# EAGLE board RedBoard_ESP32_v01-Panel (EAGLE 9.6.2), part 1 of 9
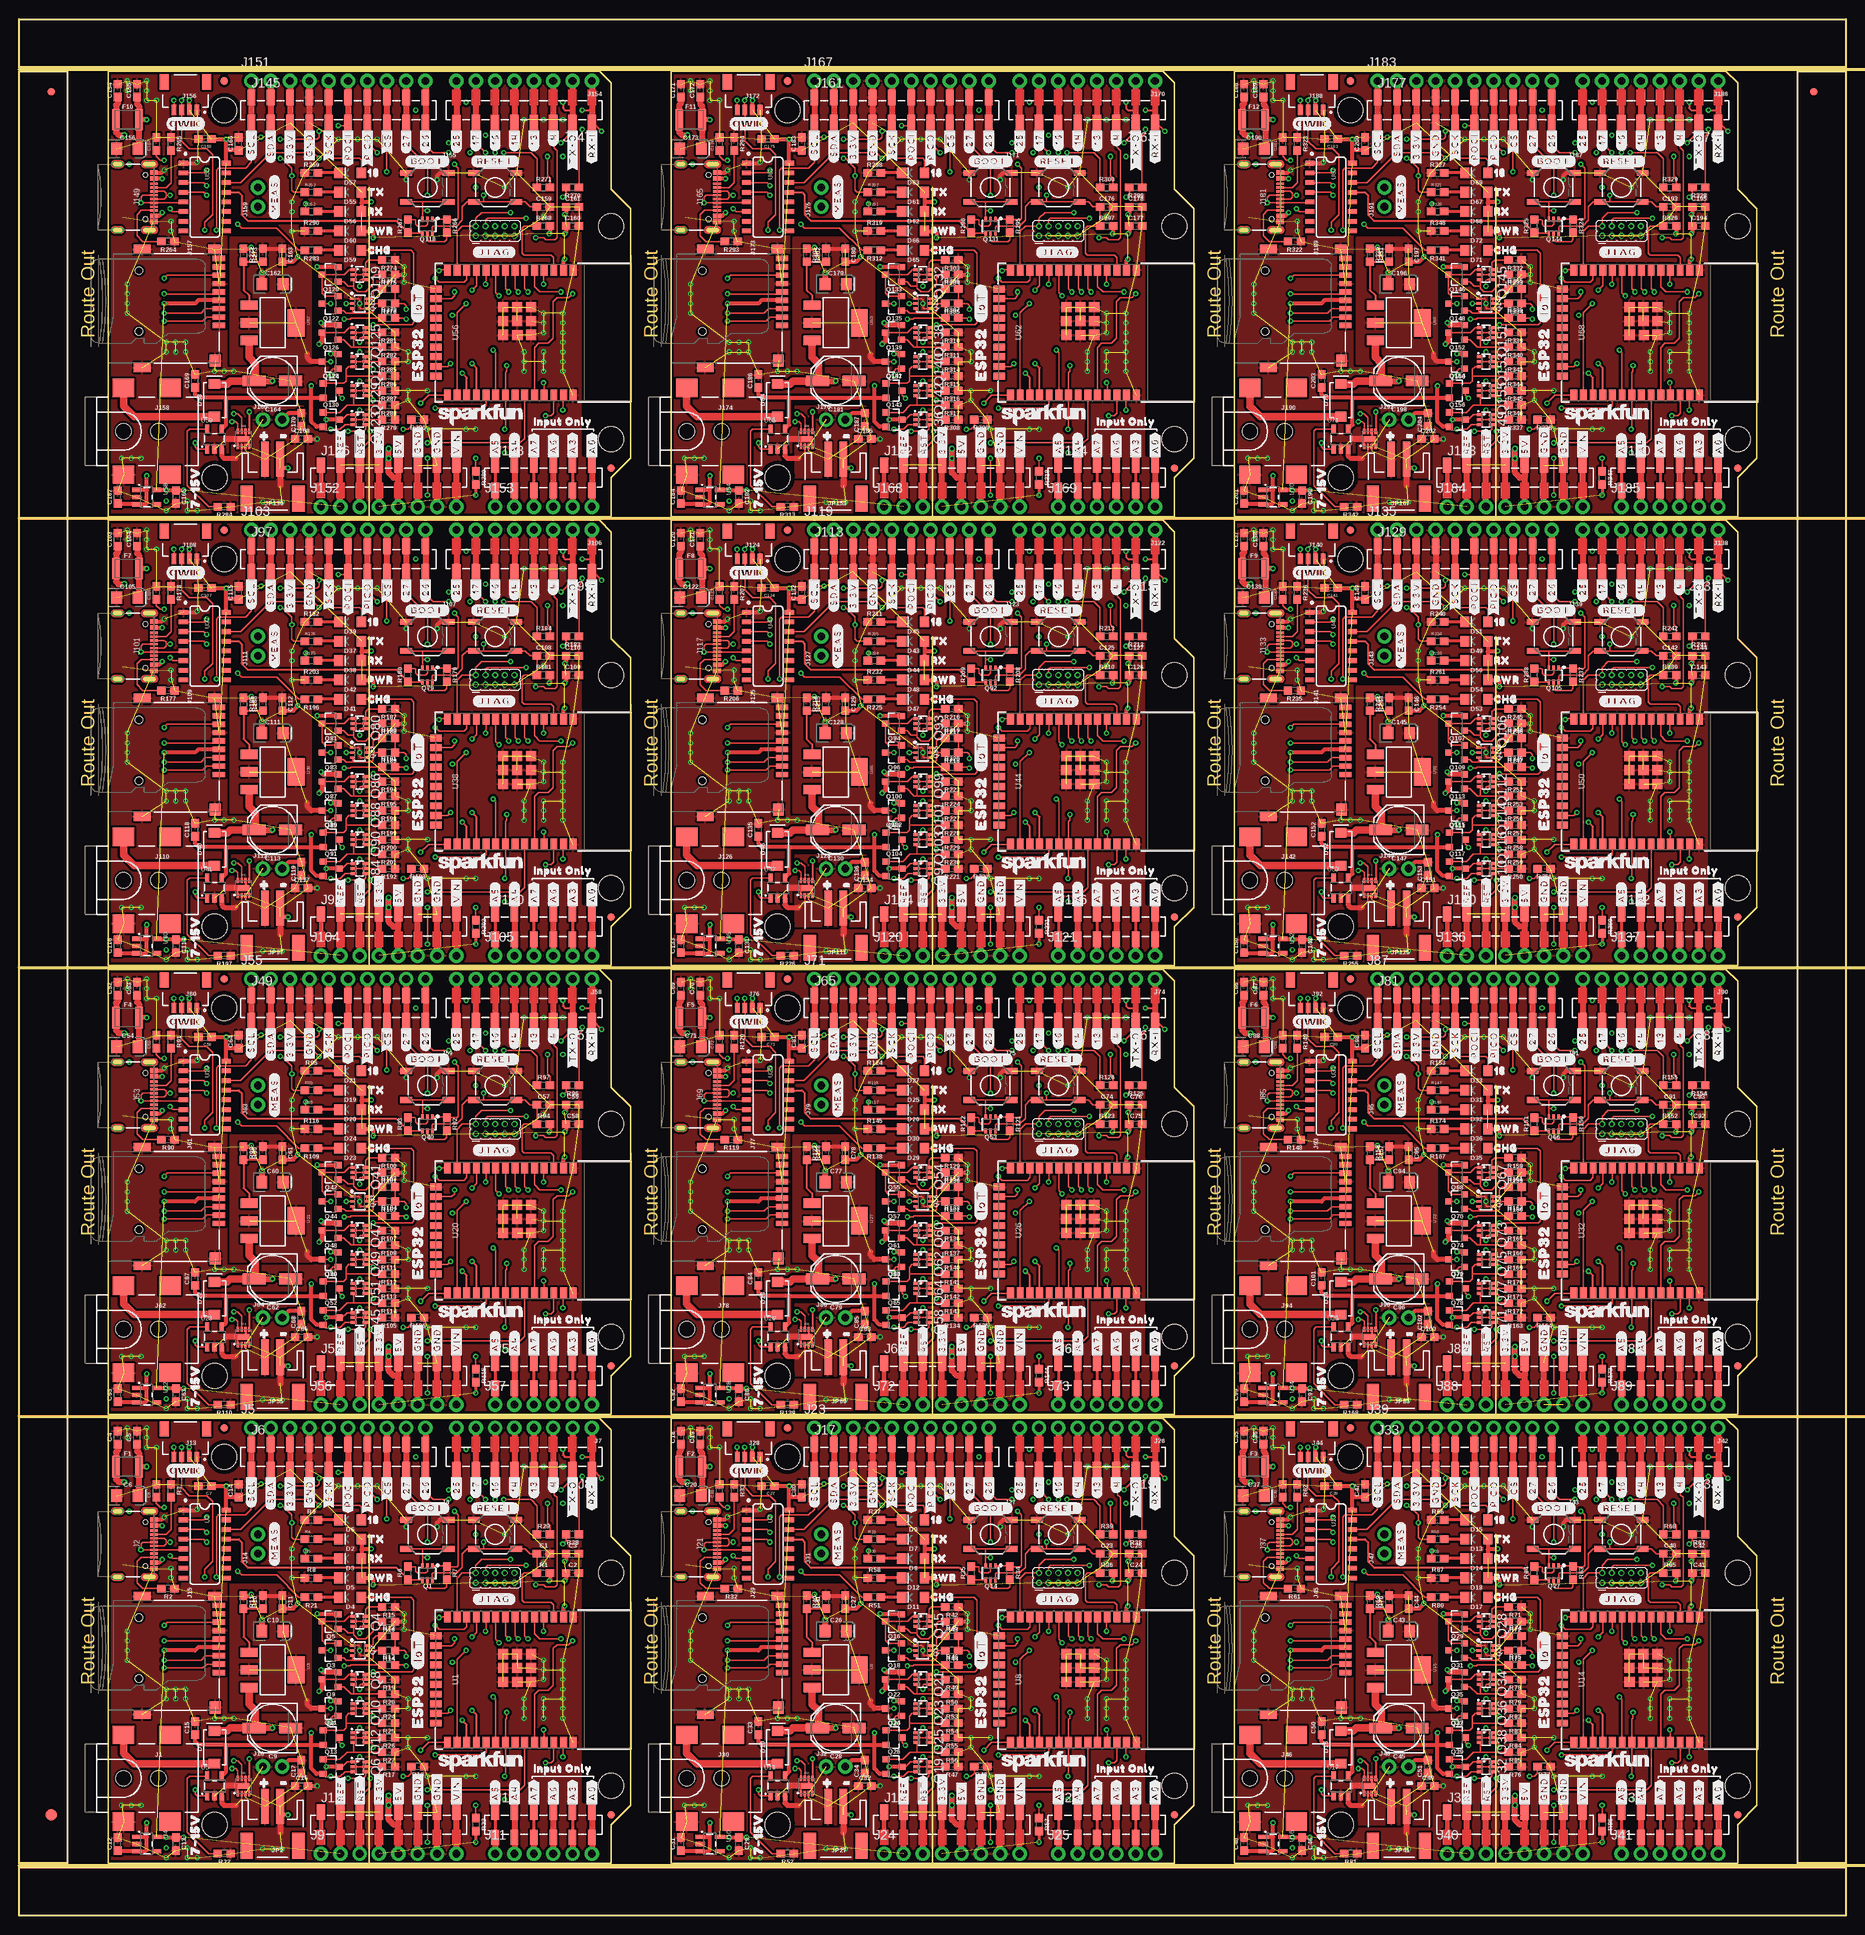
[diagram p0: board, top side]
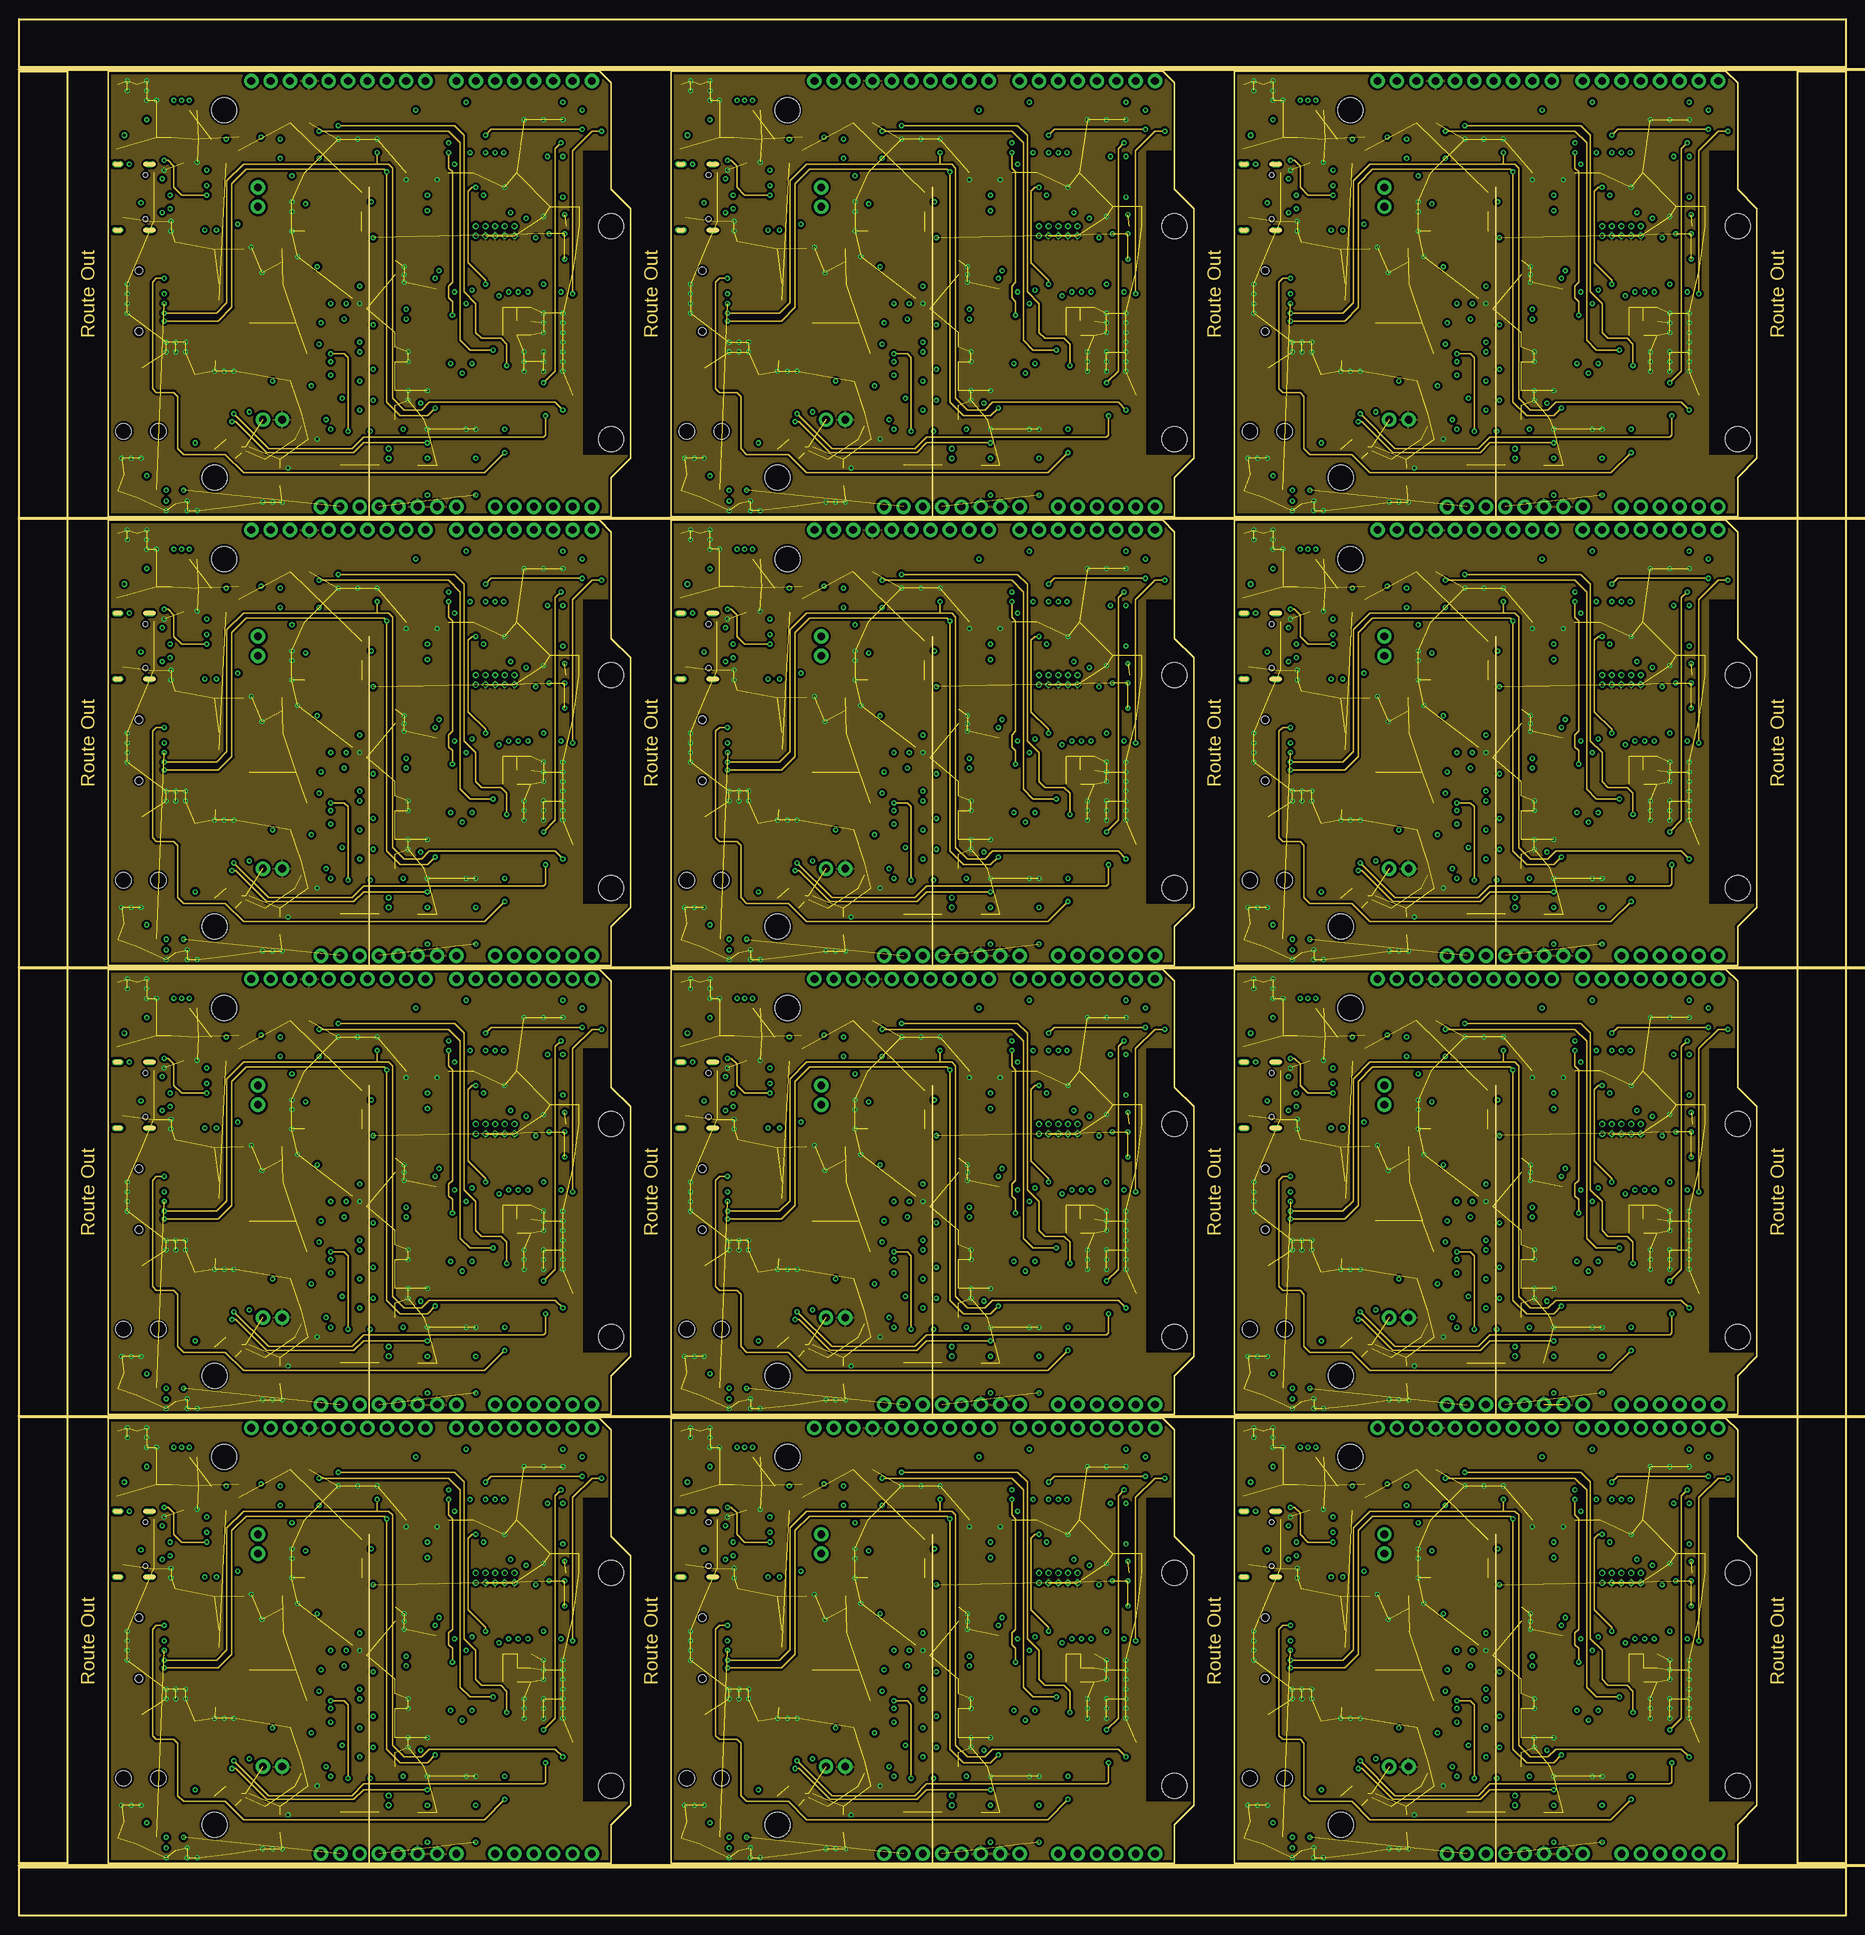
[diagram p1: board, inner layer Route2]
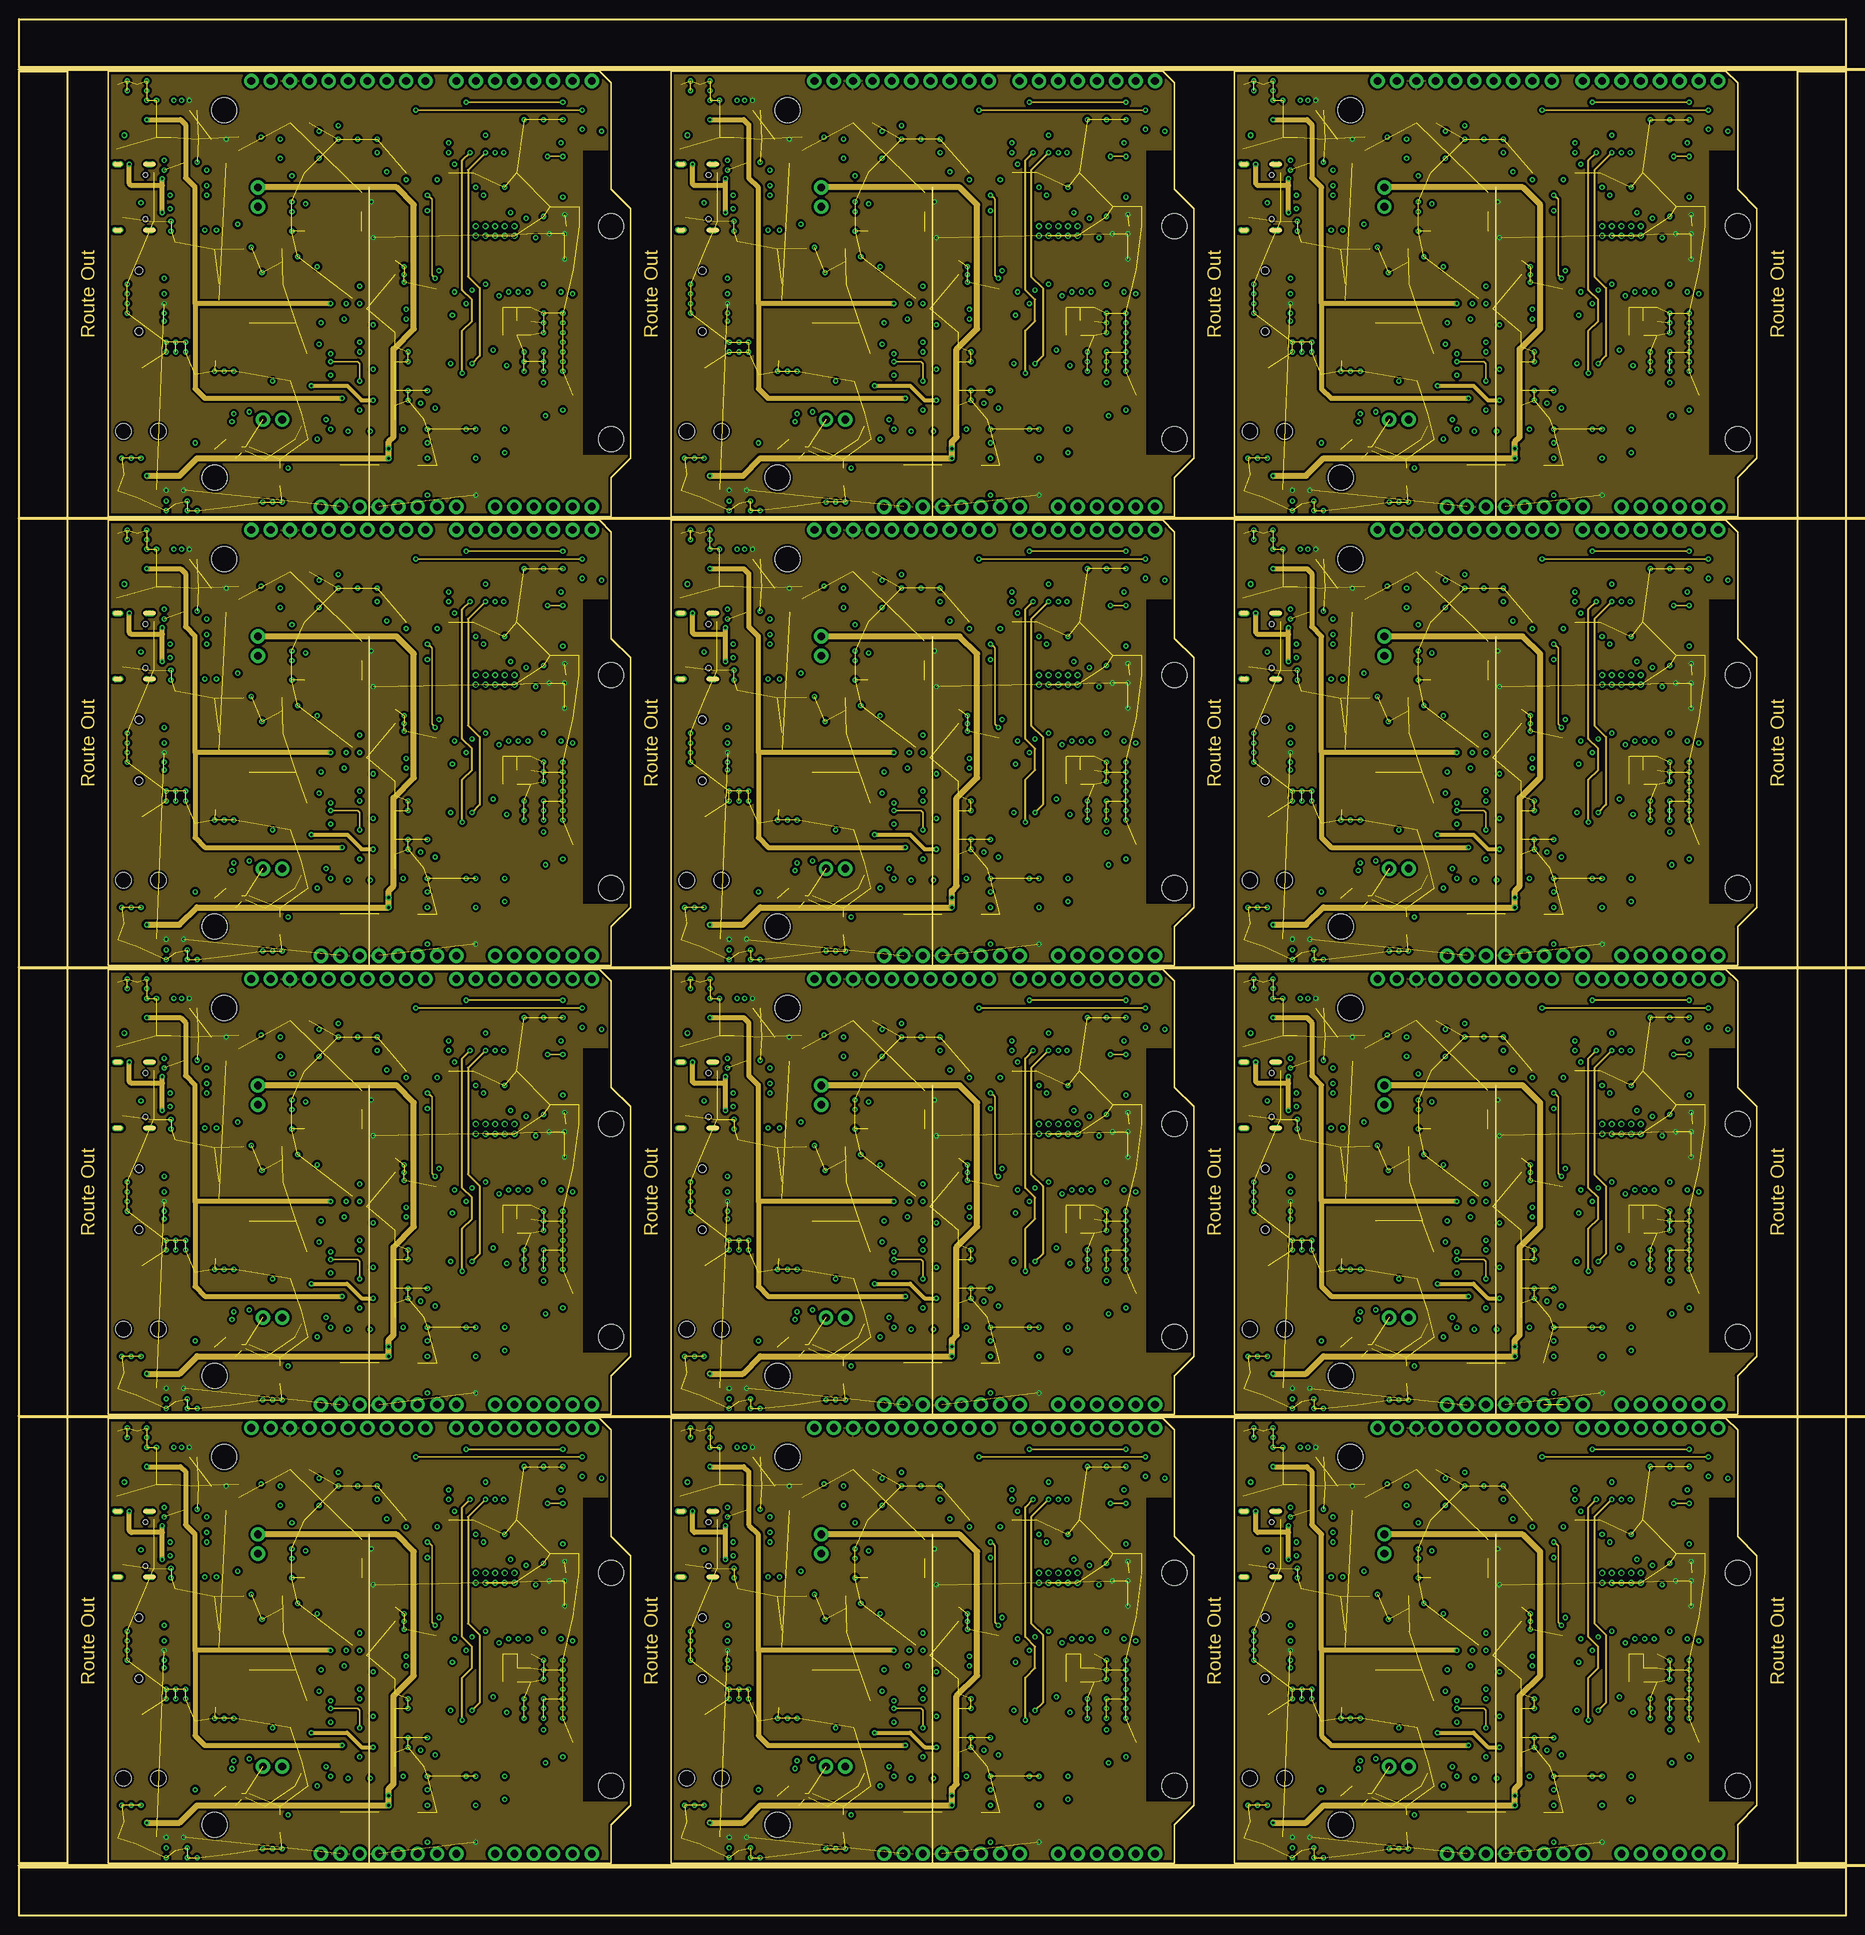
[diagram p2: board, inner layer Route15]
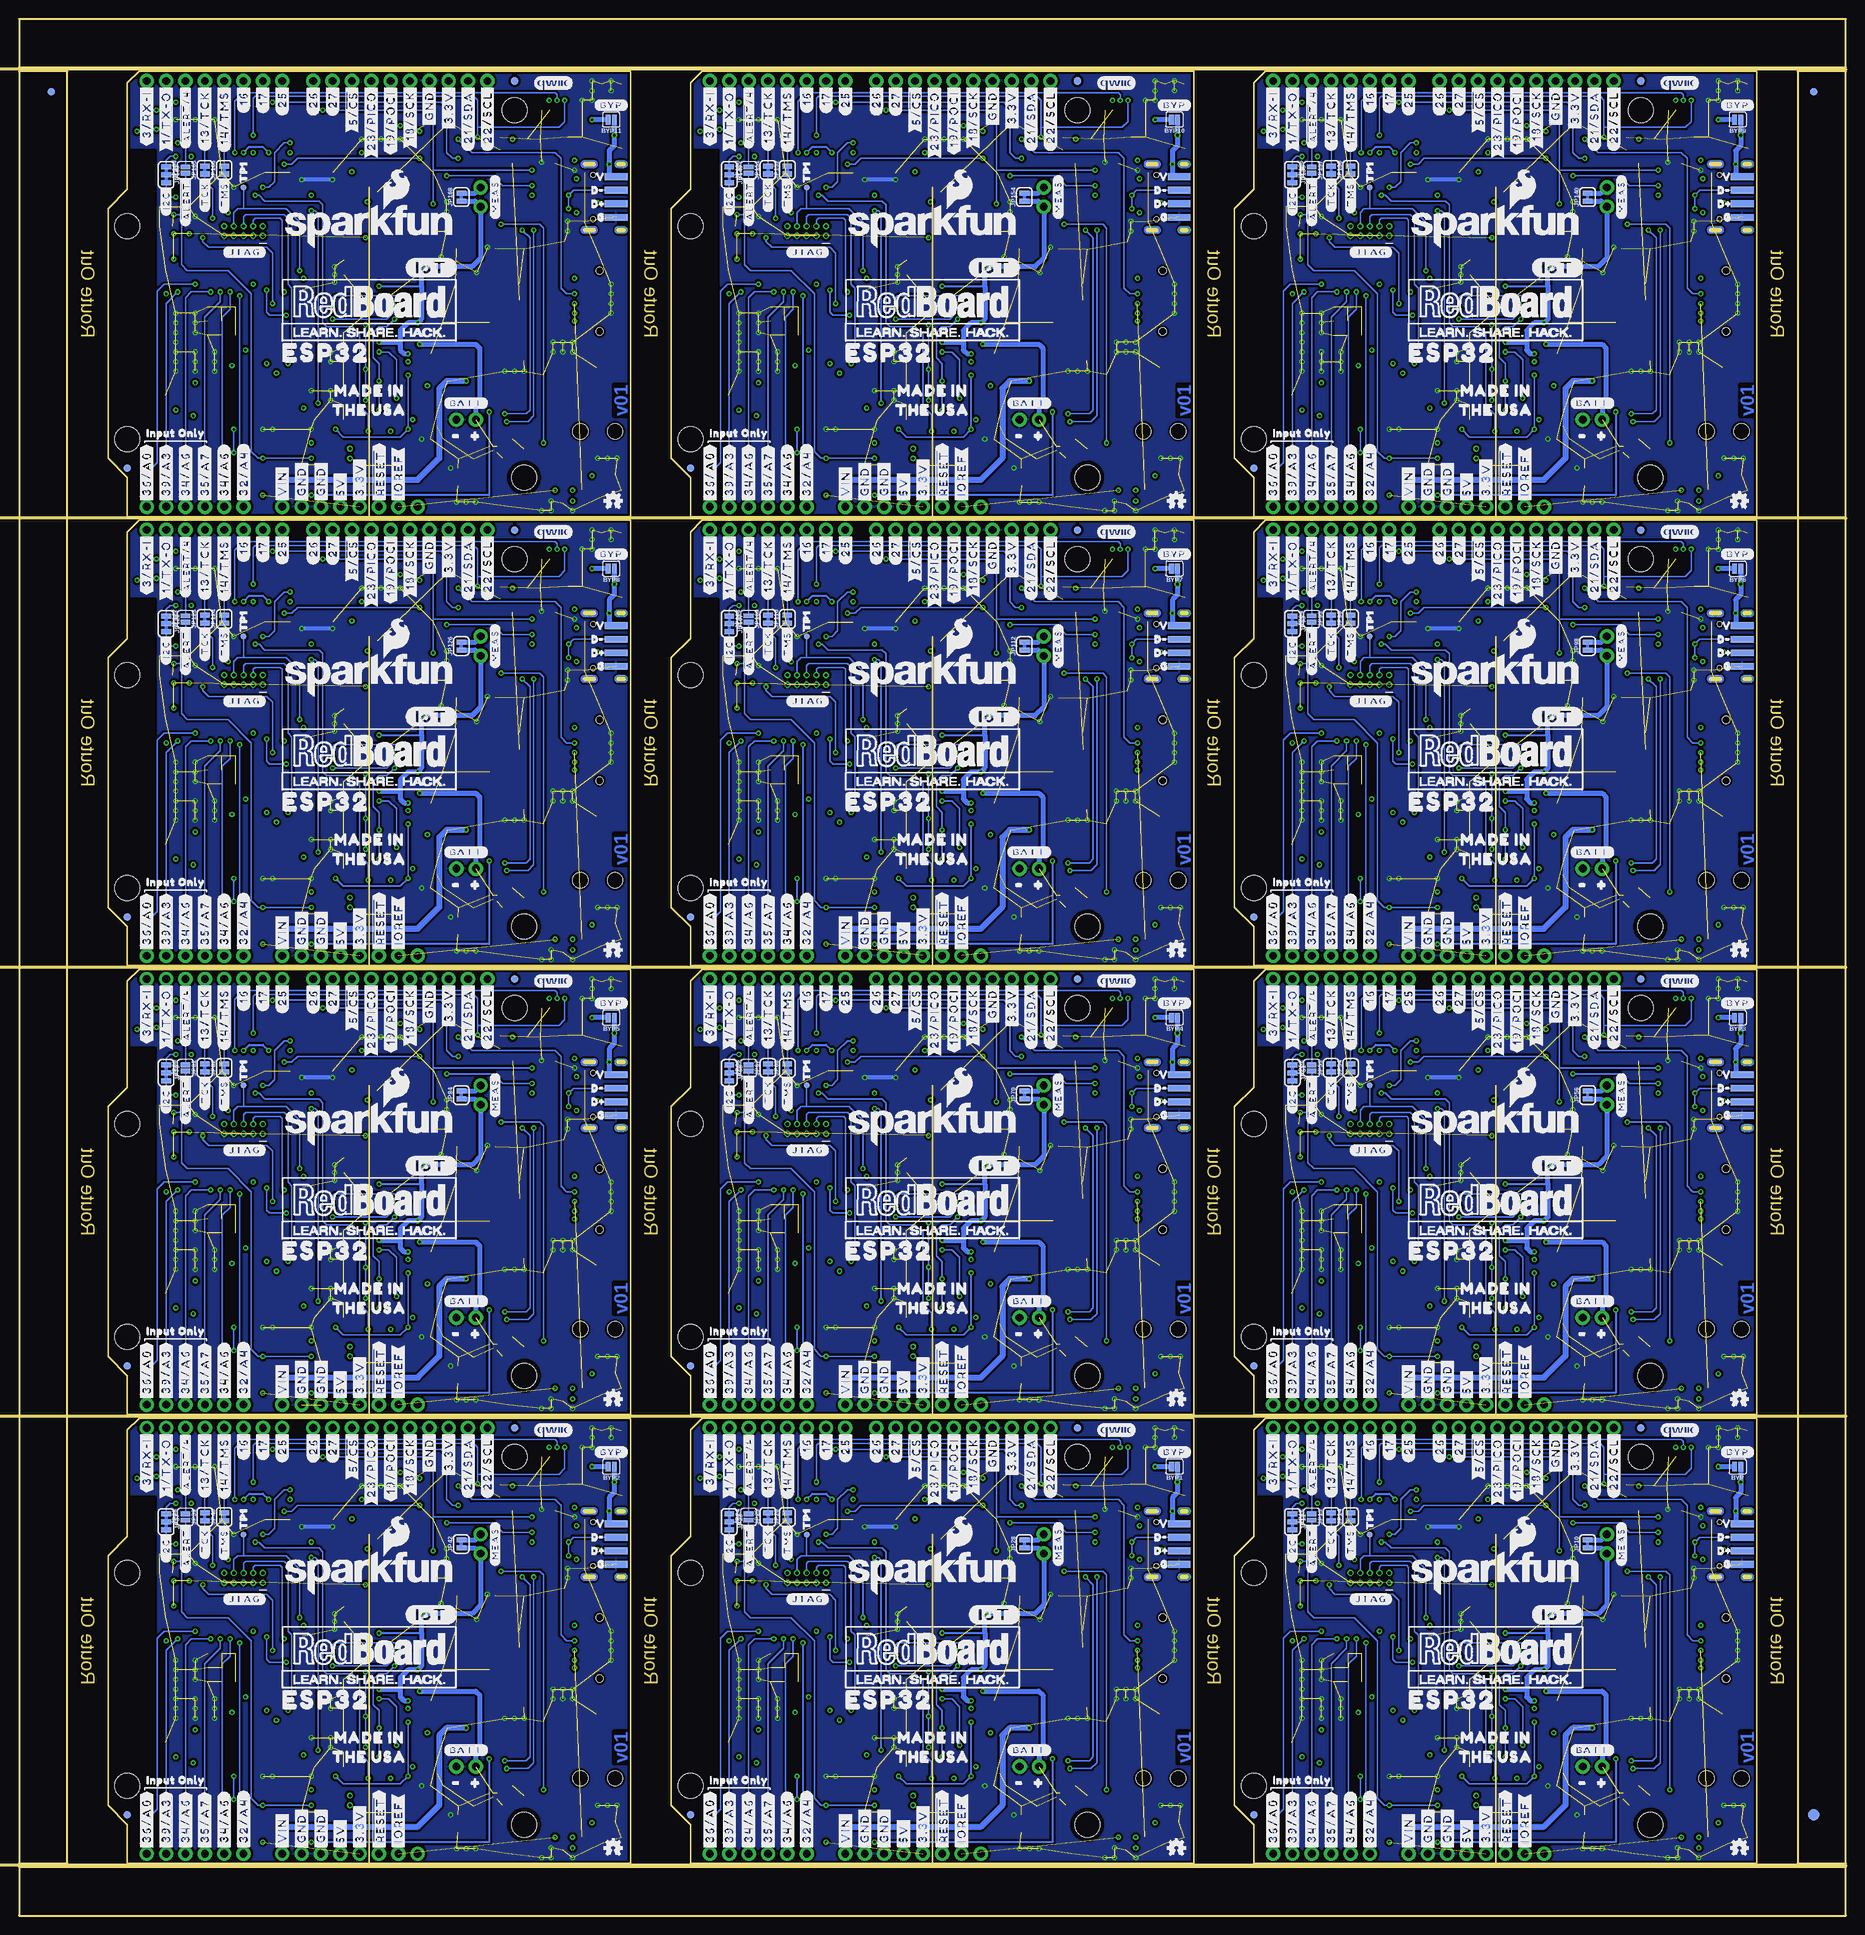
[diagram p3: board, bottom side, seen from below]

Size 239.78 x 248.92 mm. Coordinates in mm from the lower left corner, seen from the top.
Outline: 124 segments
Copper layers (1+2*15+16): Top 0.035559375mm / dielectric 0.47751875mm / Route2 0.035559375mm / dielectric 0.47751875mm / Route15 0.035559375mm / dielectric 0.47751875mm / Bottom 0.035559375mm
Design rules "RedBoard_ESP32_v01": minimum track width 7mil, minimum drill 12mil, track to track 7mil, track to pad 7mil, pad to pad 7mil, via to via 7mil, smd to smd 7mil, copper to edge 7mil, drill to drill 7mil, minimum pad ring 7mil, minimum via ring 7mil, stop-mask expansion 4mil, vias tented up to drill 25mil, thermal gap 10mil
tRestrict: area 74.2,15 to 80.3,54.9; area 148.1,15 to 154.2,54.9; area 222,15 to 228.1,54.9; area 74.2,73.9 to 80.3,113.8; area 148.1,73.9 to 154.2,113.8; area 222,73.9 to 228.1,113.8; area 74.2,132.8 to 80.3,172.7; area 148.1,132.8 to 154.2,172.7; area 222,132.8 to 228.1,172.7; area 74.2,191.8 to 80.3,231.6; area 148.1,191.8 to 154.2,231.6; area 222,191.8 to 228.1,231.6
bRestrict: area 74.2,21.8 to 80.3,40.1; area 74.2,15 to 80.3,54.9; area 148.1,21.8 to 154.2,40.1; area 148.1,15 to 154.2,54.9; area 222,21.8 to 228.1,40.1; area 222,15 to 228.1,54.9; area 74.2,80.8 to 80.3,99.1; area 74.2,73.9 to 80.3,113.8; area 148.1,80.8 to 154.2,99.1; area 148.1,73.9 to 154.2,113.8; area 222,80.8 to 228.1,99.1; area 222,73.9 to 228.1,113.8; 12 more areas
vRestrict: area 12.3,29.2 to 13.7,37.5; area 17.4,30 to 19,37.5; area 59.6,17.7 to 60.2,18.2; area 62.1,17.5 to 62.6,18.4; area 23,36.2 to 24.4,38.5; area 11.9,19.8 to 21.1,31.9; area 86.2,29.2 to 87.6,37.5; area 91.3,30 to 93,37.5; area 133.5,17.7 to 134.1,18.2; area 136,17.5 to 136.5,18.4; area 96.9,36.2 to 98.3,38.5; area 85.9,19.8 to 95,31.9; 60 more areas
Milling: 29 lines

## Footprints (pad centres in the part's own frame; a part is rotated, then mirrored left to right if it is on the bottom)
SMT-JUMPER_2_NO_SILK = smd 0.635 x 1.27: 1 -0.406,0; 2 0.406,0
0603 = smd 1.1 x 1: 1 -0.85,0; 2 0.85,0
EIA3216 = smd 1.4 x 1.6: + 1.4,0; - -1.4,0
PANASONIC_D = smd 3 x 1.4: + 2.4,0; - -2.4,0
SMA-DIODE = smd 1.27 x 1.47: A -2.15,0; C 2.15,0
LED-1206-HIDDENSILK = smd 1.2 x 1.4: A -1.5,0; C 1.5,0
FIDUCIAL-1X2 = smd 1 x 1: 1 0,0
FIDUCIAL-1.5X3 = smd 1.5 x 1.5: 1 0,0
1210 = smd 1 x 2.8: 1 -1.5,0; 2 1.5,0
POWER_JACK_SMD = smd 2.8 x 2.4: GND 0,-5.7; P$4 6.1,-5.7; VIN0 0,5.7; VIN1 6.1,5.7 | hole 2.032: 0,0; 4.572,0
USB-C-16P-2LAYER-PADS = smd 0.3 x 1: A5 -1.25,-0.34; A6 -0.25,-0.34; A7 0.25,-0.34; A8 1.25,-0.34; B5 1.75,-0.34; B6 0.75,-0.34; B7 -0.75,-0.34; B8 -1.75,-0.34 | smd 0.6 x 1: GND -3.225,-0.34; GND2 3.225,-0.34; VBUS1 -2.45,-0.34; VBUS2 2.45,-0.34 | drill 0.4 pad 0.6 long: SHLD1 -4.318,-0.915; SHLD2 4.318,-0.915; SHLD3 -4.318,-5.095; SHLD4 4.318,-5.095 | hole 0.65: -2.89,-1.445; 2.89,-1.445
USB-SOLDER-PADS = smd 3 x 0.9: D+ 0,-0.889; D- 0,0.889; GND 0,-2.667; VBUS 0,2.667
2X5_PTH_SILK_.05 = drill 0.432: 1 0,0; 2 0,1.27; 3 1.27,0; 4 1.27,1.27; 5 2.54,0; 6 2.54,1.27; 7 3.81,0; 8 3.81,1.27; 9 5.08,0; 10 5.08,1.27
1X10_NO_SILK = drill 1.016 pad 1.88: 1 0,0; 2 2.54,0; 3 5.08,0; 4 7.62,0; 5 10.16,0; 6 12.7,0; 7 15.24,0; 8 17.78,0; 9 20.32,0; 10 22.86,0
1X10_SMD_COMBINED = smd 1 x 2: 1A 0,1.65; 1B 0,-1.65; 2A 2.54,1.65; 2B 2.54,-1.65; 3A 5.08,1.65; 3B 5.08,-1.65; 4A 7.62,1.65; 4B 7.62,-1.65; 5A 10.16,1.65; 5B 10.16,-1.65; 6A 12.7,1.65; 6B 12.7,-1.65; 7A 15.24,1.65; 7B 15.24,-1.65; 8A 17.78,1.65; 8B 17.78,-1.65; 9A 20.32,1.65; 9B 20.32,-1.65; 10A 22.86,1.65; 10B 22.86,-1.65
1X08_NO_SILK = drill 1.016 pad 1.88: 1 0,0; 2 2.54,0; 3 5.08,0; 4 7.62,0; 5 10.16,0; 6 12.7,0; 7 15.24,0; 8 17.78,0
1X08_SMD_COMBINED = smd 1 x 2: 1 0,1.65; 2 2.54,1.65; 3 5.08,1.65; 4 7.62,1.652; 5 10.16,1.65; 6 12.7,1.652; 7 15.24,1.65; 8 17.78,1.652
1X06_NO_SILK = drill 1.016 pad 1.88: 1 0,0; 2 2.54,0; 3 5.08,0; 4 7.62,0; 5 10.16,0; 6 12.7,0
1X06_SMD_STRAIGHT_COMBO = smd 1 x 2: 1 0,-1.65; 1-2 0,1.65; 2 2.54,1.65; 2-2 2.54,-1.65; 3 5.08,-1.65; 3-2 5.08,1.65; 4 7.62,1.65; 4-2 7.62,-1.65; 5 10.16,-1.65; 5-2 10.16,1.65; 6 12.7,1.65; 6-2 12.7,-1.65
JST04_1MM_RA = smd 0.6 x 1.35: 1 -1.5,0; 2 -0.5,0; 3 0.5,0; 4 1.5,0 | smd 1.2 x 2: NC1 2.8,-3.675; NC2 -2.8,-3.675
1X02_NO_SILK = drill 1.016 pad 1.88: 1 0,0; 2 2.54,0
MICROSD-EXTERNALPIN = smd 0.7 x 1.6: 1 2.25,10.5; 2 1.15,10.5; 3 0.05,10.5; 4 -1.05,10.5; 5 -2.15,10.5; 6 -3.25,10.5; 7 -4.35,10.5; 8 -5.45,10.5; 9 -6.55,10.5 | smd 1.2 x 1.6: 10 -7.75,9.9 | smd 1.2 x 2.2: 11 -7.75,0.4; 12 7.75,0.4 | smd 1.6 x 1.4: 13 6.85,10 | hole 1: 3.05,0; -4.95,0
JST-2-SMD = smd 1 x 4.6: 1 -1,-3.7; 2 1,-3.7 | smd 1.6 x 3.4: NC1 -3.4,1.5; NC2 3.4,1.5
STAND-OFF = hole 3.302: 0,0
SMT-JUMPER_2_NC_TRACE_SILK = smd 0.66 x 1.27: 1 -0.521,0; 2 0.521,0
SMT-JUMPER_3_2-NC_TRACE_SILK = smd 0.66 x 1.27: 1 -1.041,0; 2 0,0; 3 1.041,0
SC70-6 = smd 0.3 x 0.66: 1 -0.65,-0.92; 2 0,-0.92; 3 0.65,-0.92; 4 0.65,0.92; 5 0,0.92; 6 -0.65,0.92
SOT23-3 = smd 0.8 x 0.9: 1 -0.95,-1; 2 0.95,-1; 3 0,1.1
SOT363_PHILIPS = smd 0.4 x 0.8: 1 -0.65,-0.8; 2 0,-0.8; 3 0.65,-0.8; 4 0.65,0.8; 5 0,0.8; 6 -0.65,0.8
TACTILE_SWITCH_SMD_5.2MM = smd 1.524 x 0.762: 1 -2.794,1.905; 2 2.794,1.905; 3 -2.794,-1.905; 4 2.794,-1.905
PAD.03X.03 = smd 0.762 x 0.762: 1 0,0
ESP-WROOM-32D-NARROW = smd 0.9 x 1.5: 1 6.43,8.238; 2 5.16,8.238; 3 3.89,8.238; 4 2.62,8.238; 5 1.35,8.238; 6 0.08,8.238; 7 -1.19,8.238; 8 -2.46,8.238; 9 -3.73,8.238; 10 -5,8.238; 11 -6.27,8.238; 12 -7.54,8.238; 13 -8.81,8.238; 14 -10.08,8.238; 25 -10.08,-8.238; 26 -8.81,-8.238; 27 -7.54,-8.238; 28 -6.27,-8.238; 29 -5,-8.238; 30 -3.73,-8.238; 31 -2.46,-8.238; 32 -1.19,-8.238; 33 0.08,-8.238; 34 1.35,-8.238; 35 2.62,-8.238; 36 3.89,-8.238; 37 5.16,-8.238; 38 6.43,-8.238 | smd 1.5 x 0.9: 15 -11.57,5.715; 16 -11.57,4.445; 17 -11.57,3.175; 18 -11.57,1.905; 19 -11.57,0.635; 20 -11.57,-0.635; 21 -11.57,-1.905; 22 -11.57,-3.175; 23 -11.57,-4.445; 24 -11.57,-5.715 | smd 1.33 x 1.33: GND1 -0.912,1.531; GNDT1 -2.751,3.346; GNDT2 -2.761,1.516; GNDT3 -2.751,-0.314; GNDT4 -0.891,-0.324; GNDT5 0.909,-0.314; GNDT6 0.909,1.516; GNDT7 0.909,3.346; GNDT8 -0.921,3.346
SO016 = smd 0.6 x 1.2: 1 -4.445,-2.8; 2 -3.175,-2.8; 3 -1.905,-2.8; 4 -0.635,-2.8; 5 0.635,-2.8; 6 1.905,-2.8; 7 3.175,-2.8; 8 4.445,-2.8; 9 4.445,2.8; 10 3.175,2.8; 11 1.905,2.8; 12 0.635,2.8; 13 -0.635,2.8; 14 -1.905,2.8; 15 -3.175,2.8; 16 -4.445,2.8
SOT223 = smd 1.219 x 2.235: 1 -2.311,-3.099; 2 0,-3.099; 3 2.311,-3.099 | smd 3.6 x 2.2: 4 0,3.099
SOT23-5 = smd 0.55 x 1.2: 1 -0.95,-1.3; 2 0,-1.3; 3 0.95,-1.3; 4 0.95,1.3; 5 -0.95,1.3
DFN-8 = smd 0.3 x 0.7: 1 -0.75,-0.99; 2 -0.25,-0.99; 3 0.25,-0.99; 4 0.75,-0.99; 5 0.75,0.99; 6 0.25,0.99; 7 -0.25,0.99; 8 -0.75,0.99 | smd 1.38 x 0.8: 9 0,0

## Placement (x,y rotation side)
BYP  JUMPER-SMT_2_NO_SILK  [SMT-JUMPER_2_NO_SILK]  14.22,58.93 180 bottom
BYP1  JUMPER-SMT_2_NO_SILK  [SMT-JUMPER_2_NO_SILK]  88.14,58.93 180 bottom
BYP2  JUMPER-SMT_2_NO_SILK  [SMT-JUMPER_2_NO_SILK]  162.05,58.93 180 bottom
BYP3  JUMPER-SMT_2_NO_SILK  [SMT-JUMPER_2_NO_SILK]  14.22,117.86 180 bottom
BYP4  JUMPER-SMT_2_NO_SILK  [SMT-JUMPER_2_NO_SILK]  88.14,117.86 180 bottom
BYP5  JUMPER-SMT_2_NO_SILK  [SMT-JUMPER_2_NO_SILK]  162.05,117.86 180 bottom
BYP6  JUMPER-SMT_2_NO_SILK  [SMT-JUMPER_2_NO_SILK]  14.22,176.78 180 bottom
BYP7  JUMPER-SMT_2_NO_SILK  [SMT-JUMPER_2_NO_SILK]  88.14,176.78 180 bottom
BYP8  JUMPER-SMT_2_NO_SILK  [SMT-JUMPER_2_NO_SILK]  162.05,176.78 180 bottom
BYP9  JUMPER-SMT_2_NO_SILK  [SMT-JUMPER_2_NO_SILK]  14.22,235.71 180 bottom
BYP10  JUMPER-SMT_2_NO_SILK  [SMT-JUMPER_2_NO_SILK]  88.14,235.71 180 bottom
BYP11  JUMPER-SMT_2_NO_SILK  [SMT-JUMPER_2_NO_SILK]  162.05,235.71 180 bottom
C1  0.1uF  [0603]  68.83,47.5 0 top
C2  0.1uF  [0603]  72.64,44.96 0 top
C3  10uF  [0603]  72.64,47.5 0 top
C4  0.1uF  [0603]  12.95,62.74 90 top
C5  0.1uF  [0603]  15.49,62.74 90 top
C6  10uF  [EIA3216]  14.22,55.12 0 top
C7  0.1uF  [0603]  24.38,56.39 180 top
C8  10nF  [0603]  18.03,55.75 90 top
C9  47uF  [PANASONIC_D]  33.27,24.64 180 top
C10  10uF  [EIA3216]  33.27,37.34 0 top
C11  0.1uF  [0603]  34.54,41.15 270 top
C12  0.1uF  [0603]  12.95,9.4 90 top
C13  0.1uF  [0603]  20.57,9.4 270 top
C14  10uF  [0603]  28.83,55.75 90 top
C15  4.7uF  [0603]  23.11,24.64 90 top
C16  4.7uF  [0603]  37.08,17.02 0 top
C17  0.1uF  [0603]  37.08,19.56 90 top
C18  0.1uF  [0603]  86.87,62.74 90 top
C19  0.1uF  [0603]  89.41,62.74 90 top
C20  10uF  [EIA3216]  88.14,55.12 0 top
C21  10nF  [0603]  91.95,55.75 90 top
C22  0.1uF  [0603]  98.3,56.39 180 top
C23  0.1uF  [0603]  142.75,47.5 0 top
C24  0.1uF  [0603]  146.56,44.96 0 top
C25  10uF  [0603]  146.56,47.5 0 top
C26  10uF  [EIA3216]  107.19,37.34 0 top
C27  0.1uF  [0603]  108.46,41.15 270 top
C28  47uF  [PANASONIC_D]  107.19,24.64 180 top
C29  0.1uF  [0603]  94.49,9.4 270 top
C30  10uF  [0603]  102.74,55.75 90 top
C31  0.1uF  [0603]  86.87,9.4 90 top
C32  4.7uF  [0603]  111,17.02 0 top
C33  4.7uF  [0603]  97.03,24.64 90 top
C34  0.1uF  [0603]  111,19.56 90 top
C35  0.1uF  [0603]  160.78,62.74 90 top
C36  0.1uF  [0603]  163.32,62.74 90 top
C37  10uF  [EIA3216]  162.05,55.12 0 top
C38  10nF  [0603]  165.86,55.75 90 top
C39  0.1uF  [0603]  172.21,56.39 180 top
C40  0.1uF  [0603]  216.66,47.5 0 top
C41  0.1uF  [0603]  220.47,44.96 0 top
C42  10uF  [0603]  220.47,47.5 0 top
C43  10uF  [EIA3216]  181.1,37.34 0 top
C44  0.1uF  [0603]  182.37,41.15 270 top
C45  47uF  [PANASONIC_D]  181.1,24.64 180 top
C46  0.1uF  [0603]  168.4,9.4 270 top
C47  10uF  [0603]  176.66,55.75 90 top
C48  0.1uF  [0603]  160.78,9.4 90 top
C49  4.7uF  [0603]  184.91,17.02 0 top
C50  4.7uF  [0603]  170.94,24.64 90 top
C51  0.1uF  [0603]  184.91,19.56 90 top
C52  0.1uF  [0603]  12.95,121.67 90 top
C53  0.1uF  [0603]  15.49,121.67 90 top
C54  10uF  [EIA3216]  14.22,114.05 0 top
C55  10nF  [0603]  18.03,114.68 90 top
C56  0.1uF  [0603]  24.38,115.32 180 top
C57  0.1uF  [0603]  68.83,106.43 0 top
C58  0.1uF  [0603]  72.64,103.89 0 top
C59  10uF  [0603]  72.64,106.43 0 top
C60  10uF  [EIA3216]  33.27,96.27 0 top
C61  0.1uF  [0603]  34.54,100.08 270 top
C62  47uF  [PANASONIC_D]  33.27,83.57 180 top
C63  0.1uF  [0603]  20.57,68.33 270 top
C64  10uF  [0603]  28.83,114.68 90 top
C65  0.1uF  [0603]  12.95,68.33 90 top
C66  4.7uF  [0603]  37.08,75.95 0 top
C67  4.7uF  [0603]  23.11,83.57 90 top
C68  0.1uF  [0603]  37.08,78.49 90 top
C69  0.1uF  [0603]  86.87,121.67 90 top
C70  0.1uF  [0603]  89.41,121.67 90 top
C71  10uF  [EIA3216]  88.14,114.05 0 top
C72  10nF  [0603]  91.95,114.68 90 top
C73  0.1uF  [0603]  98.3,115.32 180 top
C74  0.1uF  [0603]  142.75,106.43 0 top
C75  0.1uF  [0603]  146.56,103.89 0 top
C76  10uF  [0603]  146.56,106.43 0 top
C77  10uF  [EIA3216]  107.19,96.27 0 top
C78  0.1uF  [0603]  108.46,100.08 270 top
C79  47uF  [PANASONIC_D]  107.19,83.57 180 top
C80  0.1uF  [0603]  94.49,68.33 270 top
C81  10uF  [0603]  102.74,114.68 90 top
C82  0.1uF  [0603]  86.87,68.33 90 top
C83  4.7uF  [0603]  111,75.95 0 top
C84  4.7uF  [0603]  97.03,83.57 90 top
C85  0.1uF  [0603]  111,78.49 90 top
C86  0.1uF  [0603]  160.78,121.67 90 top
C87  0.1uF  [0603]  163.32,121.67 90 top
C88  10uF  [EIA3216]  162.05,114.05 0 top
C89  10nF  [0603]  165.86,114.68 90 top
C90  0.1uF  [0603]  172.21,115.32 180 top
C91  0.1uF  [0603]  216.66,106.43 0 top
C92  0.1uF  [0603]  220.47,103.89 0 top
C93  10uF  [0603]  220.47,106.43 0 top
C94  10uF  [EIA3216]  181.1,96.27 0 top
C95  0.1uF  [0603]  182.37,100.08 270 top
C96  47uF  [PANASONIC_D]  181.1,83.57 180 top
C97  0.1uF  [0603]  168.4,68.33 270 top
C98  10uF  [0603]  176.66,114.68 90 top
C99  0.1uF  [0603]  160.78,68.33 90 top
C100  4.7uF  [0603]  184.91,75.95 0 top
C101  4.7uF  [0603]  170.94,83.57 90 top
C102  0.1uF  [0603]  184.91,78.49 90 top
C103  0.1uF  [0603]  12.95,180.59 90 top
C104  0.1uF  [0603]  15.49,180.59 90 top
C105  10uF  [EIA3216]  14.22,172.97 0 top
C106  10nF  [0603]  18.03,173.61 90 top
C107  0.1uF  [0603]  24.38,174.24 180 top
C108  0.1uF  [0603]  68.83,165.35 0 top
C109  0.1uF  [0603]  72.64,162.81 0 top
C110  10uF  [0603]  72.64,165.35 0 top
C111  10uF  [EIA3216]  33.27,155.19 0 top
C112  0.1uF  [0603]  34.54,159 270 top
C113  47uF  [PANASONIC_D]  33.27,142.49 180 top
C114  0.1uF  [0603]  20.57,127.25 270 top
C115  10uF  [0603]  28.83,173.61 90 top
C116  0.1uF  [0603]  12.95,127.25 90 top
C117  4.7uF  [0603]  37.08,134.87 0 top
C118  4.7uF  [0603]  23.11,142.49 90 top
C119  0.1uF  [0603]  37.08,137.41 90 top
C120  0.1uF  [0603]  86.87,180.59 90 top
C121  0.1uF  [0603]  89.41,180.59 90 top
C122  10uF  [EIA3216]  88.14,172.97 0 top
C123  10nF  [0603]  91.95,173.61 90 top
C124  0.1uF  [0603]  98.3,174.24 180 top
C125  0.1uF  [0603]  142.75,165.35 0 top
C126  0.1uF  [0603]  146.56,162.81 0 top
C127  10uF  [0603]  146.56,165.35 0 top
C128  10uF  [EIA3216]  107.19,155.19 0 top
C129  0.1uF  [0603]  108.46,159 270 top
C130  47uF  [PANASONIC_D]  107.19,142.49 180 top
C131  0.1uF  [0603]  94.49,127.25 270 top
C132  10uF  [0603]  102.74,173.61 90 top
C133  0.1uF  [0603]  86.87,127.25 90 top
C134  4.7uF  [0603]  111,134.87 0 top
C135  4.7uF  [0603]  97.03,142.49 90 top
C136  0.1uF  [0603]  111,137.41 90 top
C137  0.1uF  [0603]  160.78,180.59 90 top
C138  0.1uF  [0603]  163.32,180.59 90 top
C139  10uF  [EIA3216]  162.05,172.97 0 top
C140  10nF  [0603]  165.86,173.61 90 top
C141  0.1uF  [0603]  172.21,174.24 180 top
C142  0.1uF  [0603]  216.66,165.35 0 top
C143  0.1uF  [0603]  220.47,162.81 0 top
C144  10uF  [0603]  220.47,165.35 0 top
C145  10uF  [EIA3216]  181.1,155.19 0 top
C146  0.1uF  [0603]  182.37,159 270 top
C147  47uF  [PANASONIC_D]  181.1,142.49 180 top
C148  0.1uF  [0603]  168.4,127.25 270 top
C149  10uF  [0603]  176.66,173.61 90 top
C150  0.1uF  [0603]  160.78,127.25 90 top
C151  4.7uF  [0603]  184.91,134.87 0 top
C152  4.7uF  [0603]  170.94,142.49 90 top
C153  0.1uF  [0603]  184.91,137.41 90 top
C154  0.1uF  [0603]  12.95,239.52 90 top
C155  0.1uF  [0603]  15.49,239.52 90 top
C156  10uF  [EIA3216]  14.22,231.9 0 top
C157  10nF  [0603]  18.03,232.54 90 top
C158  0.1uF  [0603]  24.38,233.17 180 top
C159  0.1uF  [0603]  68.83,224.28 0 top
C160  0.1uF  [0603]  72.64,221.74 0 top
C161  10uF  [0603]  72.64,224.28 0 top
C162  10uF  [EIA3216]  33.27,214.12 0 top
C163  0.1uF  [0603]  34.54,217.93 270 top
C164  47uF  [PANASONIC_D]  33.27,201.42 180 top
C165  0.1uF  [0603]  20.57,186.18 270 top
C166  10uF  [0603]  28.83,232.54 90 top
C167  0.1uF  [0603]  12.95,186.18 90 top
C168  4.7uF  [0603]  37.08,193.8 0 top
C169  4.7uF  [0603]  23.11,201.42 90 top
C170  0.1uF  [0603]  37.08,196.34 90 top
C171  0.1uF  [0603]  86.87,239.52 90 top
C172  0.1uF  [0603]  89.41,239.52 90 top
C173  10uF  [EIA3216]  88.14,231.9 0 top
C174  10nF  [0603]  91.95,232.54 90 top
C175  0.1uF  [0603]  98.3,233.17 180 top
C176  0.1uF  [0603]  142.75,224.28 0 top
C177  0.1uF  [0603]  146.56,221.74 0 top
C178  10uF  [0603]  146.56,224.28 0 top
C179  10uF  [EIA3216]  107.19,214.12 0 top
C180  0.1uF  [0603]  108.46,217.93 270 top
C181  47uF  [PANASONIC_D]  107.19,201.42 180 top
C182  0.1uF  [0603]  94.49,186.18 270 top
C183  10uF  [0603]  102.74,232.54 90 top
C184  0.1uF  [0603]  86.87,186.18 90 top
C185  4.7uF  [0603]  111,193.8 0 top
C186  4.7uF  [0603]  97.03,201.42 90 top
C187  0.1uF  [0603]  111,196.34 90 top
C188  0.1uF  [0603]  160.78,239.52 90 top
C189  0.1uF  [0603]  163.32,239.52 90 top
C190  10uF  [EIA3216]  162.05,231.9 0 top
C191  10nF  [0603]  165.86,232.54 90 top
C192  0.1uF  [0603]  172.21,233.17 180 top
C193  0.1uF  [0603]  216.66,224.28 0 top
C194  0.1uF  [0603]  220.47,221.74 0 top
C195  10uF  [0603]  220.47,224.28 0 top
C196  10uF  [EIA3216]  181.1,214.12 0 top
C197  0.1uF  [0603]  182.37,217.93 270 top
C198  47uF  [PANASONIC_D]  181.1,201.42 180 top
C199  0.1uF  [0603]  168.4,186.18 270 top
C200  10uF  [0603]  176.66,232.54 90 top
C201  0.1uF  [0603]  160.78,186.18 90 top
C202  4.7uF  [0603]  184.91,193.8 0 top
C203  4.7uF  [0603]  170.94,201.42 90 top
C204  0.1uF  [0603]  184.91,196.34 90 top
D1  1A/40V/500mV  [SMA-DIODE]  25.65,22.1 90 top
D2  GREEN  [LED-1206-HIDDENSILK]  43.43,49.4 180 top
D3  YELLOW  [LED-1206-HIDDENSILK]  43.43,46.86 180 top
D4  RED  [LED-1206-HIDDENSILK]  43.43,41.78 180 top
D5  PWR  [LED-1206-HIDDENSILK]  43.43,44.32 180 top
D6  BLUE  [LED-1206-HIDDENSILK]  43.43,51.94 180 top
D7  GREEN  [LED-1206-HIDDENSILK]  117.35,49.4 180 top
D8  YELLOW  [LED-1206-HIDDENSILK]  117.35,46.86 180 top
D9  BLUE  [LED-1206-HIDDENSILK]  117.35,51.94 180 top
D10  1A/40V/500mV  [SMA-DIODE]  99.57,22.1 90 top
D11  RED  [LED-1206-HIDDENSILK]  117.35,41.78 180 top
D12  PWR  [LED-1206-HIDDENSILK]  117.35,44.32 180 top
D13  GREEN  [LED-1206-HIDDENSILK]  191.26,49.4 180 top
D14  YELLOW  [LED-1206-HIDDENSILK]  191.26,46.86 180 top
D15  BLUE  [LED-1206-HIDDENSILK]  191.26,51.94 180 top
D16  1A/40V/500mV  [SMA-DIODE]  173.48,22.1 90 top
D17  RED  [LED-1206-HIDDENSILK]  191.26,41.78 180 top
D18  PWR  [LED-1206-HIDDENSILK]  191.26,44.32 180 top
D19  GREEN  [LED-1206-HIDDENSILK]  43.43,108.33 180 top
D20  YELLOW  [LED-1206-HIDDENSILK]  43.43,105.79 180 top
D21  BLUE  [LED-1206-HIDDENSILK]  43.43,110.87 180 top
D22  1A/40V/500mV  [SMA-DIODE]  25.65,81.03 90 top
D23  RED  [LED-1206-HIDDENSILK]  43.43,100.71 180 top
D24  PWR  [LED-1206-HIDDENSILK]  43.43,103.25 180 top
D25  GREEN  [LED-1206-HIDDENSILK]  117.35,108.33 180 top
D26  YELLOW  [LED-1206-HIDDENSILK]  117.35,105.79 180 top
D27  BLUE  [LED-1206-HIDDENSILK]  117.35,110.87 180 top
D28  1A/40V/500mV  [SMA-DIODE]  99.57,81.03 90 top
D29  RED  [LED-1206-HIDDENSILK]  117.35,100.71 180 top
D30  PWR  [LED-1206-HIDDENSILK]  117.35,103.25 180 top
D31  GREEN  [LED-1206-HIDDENSILK]  191.26,108.33 180 top
D32  YELLOW  [LED-1206-HIDDENSILK]  191.26,105.79 180 top
D33  BLUE  [LED-1206-HIDDENSILK]  191.26,110.87 180 top
D34  1A/40V/500mV  [SMA-DIODE]  173.48,81.03 90 top
D35  RED  [LED-1206-HIDDENSILK]  191.26,100.71 180 top
D36  PWR  [LED-1206-HIDDENSILK]  191.26,103.25 180 top
D37  GREEN  [LED-1206-HIDDENSILK]  43.43,167.26 180 top
D38  YELLOW  [LED-1206-HIDDENSILK]  43.43,164.72 180 top
D39  BLUE  [LED-1206-HIDDENSILK]  43.43,169.8 180 top
D40  1A/40V/500mV  [SMA-DIODE]  25.65,139.95 90 top
D41  RED  [LED-1206-HIDDENSILK]  43.43,159.64 180 top
D42  PWR  [LED-1206-HIDDENSILK]  43.43,162.18 180 top
D43  GREEN  [LED-1206-HIDDENSILK]  117.35,167.26 180 top
D44  YELLOW  [LED-1206-HIDDENSILK]  117.35,164.72 180 top
D45  BLUE  [LED-1206-HIDDENSILK]  117.35,169.8 180 top
D46  1A/40V/500mV  [SMA-DIODE]  99.57,139.95 90 top
D47  RED  [LED-1206-HIDDENSILK]  117.35,159.64 180 top
D48  PWR  [LED-1206-HIDDENSILK]  117.35,162.18 180 top
D49  GREEN  [LED-1206-HIDDENSILK]  191.26,167.26 180 top
D50  YELLOW  [LED-1206-HIDDENSILK]  191.26,164.72 180 top
D51  BLUE  [LED-1206-HIDDENSILK]  191.26,169.8 180 top
D52  1A/40V/500mV  [SMA-DIODE]  173.48,139.95 90 top
D53  RED  [LED-1206-HIDDENSILK]  191.26,159.64 180 top
D54  PWR  [LED-1206-HIDDENSILK]  191.26,162.18 180 top
D55  GREEN  [LED-1206-HIDDENSILK]  43.43,226.19 180 top
D56  YELLOW  [LED-1206-HIDDENSILK]  43.43,223.65 180 top
D57  BLUE  [LED-1206-HIDDENSILK]  43.43,228.73 180 top
D58  1A/40V/500mV  [SMA-DIODE]  25.65,198.88 90 top
D59  RED  [LED-1206-HIDDENSILK]  43.43,218.57 180 top
D60  PWR  [LED-1206-HIDDENSILK]  43.43,221.11 180 top
D61  GREEN  [LED-1206-HIDDENSILK]  117.35,226.19 180 top
D62  YELLOW  [LED-1206-HIDDENSILK]  117.35,223.65 180 top
D63  BLUE  [LED-1206-HIDDENSILK]  117.35,228.73 180 top
D64  1A/40V/500mV  [SMA-DIODE]  99.57,198.88 90 top
D65  RED  [LED-1206-HIDDENSILK]  117.35,218.57 180 top
D66  PWR  [LED-1206-HIDDENSILK]  117.35,221.11 180 top
D67  GREEN  [LED-1206-HIDDENSILK]  191.26,226.19 180 top
D68  YELLOW  [LED-1206-HIDDENSILK]  191.26,223.65 180 top
D69  BLUE  [LED-1206-HIDDENSILK]  191.26,228.73 180 top
D70  1A/40V/500mV  [SMA-DIODE]  173.48,198.88 90 top
D71  RED  [LED-1206-HIDDENSILK]  191.26,218.57 180 top
D72  PWR  [LED-1206-HIDDENSILK]  191.26,221.11 180 top
E$1  [FIDUCIAL-1X2]  4.23,239.4 0 top
E$2  [FIDUCIAL-1X2]  4.23,239.4 0 bottom
E$3  [FIDUCIAL-1X2]  235.54,239.4 0 top
E$4  [FIDUCIAL-1X2]  235.54,239.4 0 bottom
E$5  [FIDUCIAL-1.5X3]  4.23,13.21 0 top
E$6  [FIDUCIAL-1.5X3]  4.23,13.21 0 bottom
F1  6V/2A  [1210]  14.22,58.93 0 top
F2  6V/2A  [1210]  88.14,58.93 0 top
F3  6V/2A  [1210]  162.05,58.93 0 top
F4  6V/2A  [1210]  14.22,117.86 0 top
F5  6V/2A  [1210]  88.14,117.86 0 top
F6  6V/2A  [1210]  162.05,117.86 0 top
F7  6V/2A  [1210]  14.22,176.78 0 top
F8  6V/2A  [1210]  88.14,176.78 0 top
F9  6V/2A  [1210]  162.05,176.78 0 top
F10  6V/2A  [1210]  14.22,235.71 0 top
F11  6V/2A  [1210]  88.14,235.71 0 top
F12  6V/2A  [1210]  162.05,235.71 0 top
J1  5.5x2.1mm Barrel  [POWER_JACK_SMD]  13.72,18.03 0 top
J2  USB C  [USB-C-16P-2LAYER-PADS]  18.03,48.77 270 top
J3  USB_SOLDER_PADS  [USB-SOLDER-PADS]  13.59,48.77 0 bottom
J4  [2X5_PTH_SILK_.05]  59.94,43.69 0 top
J5  M10NO_SILK  [1X10_NO_SILK]  30.48,64.01 0 top
J6  [1X10_SMD_COMBINED]  30.48,60.2 0 top
J7  [1X08_NO_SILK]  75.18,64.01 180 top
J8  [1X08_SMD_COMBINED]  75.18,60.2 180 top
J9  [1X08_NO_SILK]  39.62,8.13 0 top
J10  [1X08_SMD_COMBINED]  39.62,11.94 0 top
J11  [1X06_NO_SILK]  62.48,8.13 0 top
J12  [1X06_SMD_STRAIGHT_COMBO]  62.48,11.94 0 top
J13  QWIIC_RIGHT_ANGLE  [JST04_1MM_RA]  21.84,60.2 180 top
J14  [1X02_NO_SILK]  31.37,47.5 90 top
J15  MICRO-SD-PUSH-PUSH-EXT-PIN  [MICROSD-EXTERNALPIN]  15.75,34.16 270 top
J16  [1X02_NO_SILK]  32,19.56 0 top
J17  [1X10_SMD_COMBINED]  104.39,60.2 0 top
J18  [1X08_SMD_COMBINED]  113.54,11.94 0 top
J19  [1X08_SMD_COMBINED]  149.1,60.2 180 top
J20  [1X06_SMD_STRAIGHT_COMBO]  136.4,11.94 0 top
J21  USB C  [USB-C-16P-2LAYER-PADS]  91.95,48.77 270 top
J22  USB_SOLDER_PADS  [USB-SOLDER-PADS]  87.5,48.77 0 bottom
J23  M10NO_SILK  [1X10_NO_SILK]  104.39,64.01 0 top
J24  [1X08_NO_SILK]  113.54,8.13 0 top
J25  [1X06_NO_SILK]  136.4,8.13 0 top
J26  [1X08_NO_SILK]  149.1,64.01 180 top
J27  [2X5_PTH_SILK_.05]  133.86,43.69 0 top
J28  QWIIC_RIGHT_ANGLE  [JST04_1MM_RA]  95.76,60.2 180 top
J29  MICRO-SD-PUSH-PUSH-EXT-PIN  [MICROSD-EXTERNALPIN]  89.66,34.16 270 top
J30  5.5x2.1mm Barrel  [POWER_JACK_SMD]  87.63,18.03 0 top
J31  [1X02_NO_SILK]  105.28,47.5 90 top
J32  [1X02_NO_SILK]  105.92,19.56 0 top
J33  [1X10_SMD_COMBINED]  178.31,60.2 0 top
J34  [1X08_SMD_COMBINED]  187.45,11.94 0 top
J35  [1X08_SMD_COMBINED]  223.01,60.2 180 top
J36  [1X06_SMD_STRAIGHT_COMBO]  210.31,11.94 0 top
J37  USB C  [USB-C-16P-2LAYER-PADS]  165.86,48.77 270 top
J38  USB_SOLDER_PADS  [USB-SOLDER-PADS]  161.42,48.77 0 bottom
J39  M10NO_SILK  [1X10_NO_SILK]  178.31,64.01 0 top
J40  [1X08_NO_SILK]  187.45,8.13 0 top
J41  [1X06_NO_SILK]  210.31,8.13 0 top
J42  [1X08_NO_SILK]  223.01,64.01 180 top
J43  [2X5_PTH_SILK_.05]  207.77,43.69 0 top
J44  QWIIC_RIGHT_ANGLE  [JST04_1MM_RA]  169.67,60.2 180 top
J45  MICRO-SD-PUSH-PUSH-EXT-PIN  [MICROSD-EXTERNALPIN]  163.58,34.16 270 top
J46  5.5x2.1mm Barrel  [POWER_JACK_SMD]  161.54,18.03 0 top
J47  [1X02_NO_SILK]  179.2,47.5 90 top
J48  [1X02_NO_SILK]  179.83,19.56 0 top
J49  [1X10_SMD_COMBINED]  30.48,119.13 0 top
J50  [1X08_SMD_COMBINED]  39.62,70.87 0 top
J51  [1X08_SMD_COMBINED]  75.18,119.13 180 top
J52  [1X06_SMD_STRAIGHT_COMBO]  62.48,70.87 0 top
J53  USB C  [USB-C-16P-2LAYER-PADS]  18.03,107.7 270 top
J54  USB_SOLDER_PADS  [USB-SOLDER-PADS]  13.59,107.7 0 bottom
J55  M10NO_SILK  [1X10_NO_SILK]  30.48,122.94 0 top
J56  [1X08_NO_SILK]  39.62,67.06 0 top
J57  [1X06_NO_SILK]  62.48,67.06 0 top
J58  [1X08_NO_SILK]  75.18,122.94 180 top
J59  [2X5_PTH_SILK_.05]  59.94,102.62 0 top
J60  QWIIC_RIGHT_ANGLE  [JST04_1MM_RA]  21.84,119.13 180 top
J61  MICRO-SD-PUSH-PUSH-EXT-PIN  [MICROSD-EXTERNALPIN]  15.75,93.09 270 top
J62  5.5x2.1mm Barrel  [POWER_JACK_SMD]  13.72,76.96 0 top
J63  [1X02_NO_SILK]  31.37,106.43 90 top
J64  [1X02_NO_SILK]  32,78.49 0 top
J65  [1X10_SMD_COMBINED]  104.39,119.13 0 top
J66  [1X08_SMD_COMBINED]  113.54,70.87 0 top
J67  [1X08_SMD_COMBINED]  149.1,119.13 180 top
J68  [1X06_SMD_STRAIGHT_COMBO]  136.4,70.87 0 top
J69  USB C  [USB-C-16P-2LAYER-PADS]  91.95,107.7 270 top
J70  USB_SOLDER_PADS  [USB-SOLDER-PADS]  87.5,107.7 0 bottom
J71  M10NO_SILK  [1X10_NO_SILK]  104.39,122.94 0 top
J72  [1X08_NO_SILK]  113.54,67.06 0 top
J73  [1X06_NO_SILK]  136.4,67.06 0 top
J74  [1X08_NO_SILK]  149.1,122.94 180 top
J75  [2X5_PTH_SILK_.05]  133.86,102.62 0 top
J76  QWIIC_RIGHT_ANGLE  [JST04_1MM_RA]  95.76,119.13 180 top
J77  MICRO-SD-PUSH-PUSH-EXT-PIN  [MICROSD-EXTERNALPIN]  89.66,93.09 270 top
J78  5.5x2.1mm Barrel  [POWER_JACK_SMD]  87.63,76.96 0 top
J79  [1X02_NO_SILK]  105.28,106.43 90 top
J80  [1X02_NO_SILK]  105.92,78.49 0 top
J81  [1X10_SMD_COMBINED]  178.31,119.13 0 top
J82  [1X08_SMD_COMBINED]  187.45,70.87 0 top
J83  [1X08_SMD_COMBINED]  223.01,119.13 180 top
J84  [1X06_SMD_STRAIGHT_COMBO]  210.31,70.87 0 top
J85  USB C  [USB-C-16P-2LAYER-PADS]  165.86,107.7 270 top
J86  USB_SOLDER_PADS  [USB-SOLDER-PADS]  161.42,107.7 0 bottom
J87  M10NO_SILK  [1X10_NO_SILK]  178.31,122.94 0 top
J88  [1X08_NO_SILK]  187.45,67.06 0 top
J89  [1X06_NO_SILK]  210.31,67.06 0 top
J90  [1X08_NO_SILK]  223.01,122.94 180 top
J91  [2X5_PTH_SILK_.05]  207.77,102.62 0 top
J92  QWIIC_RIGHT_ANGLE  [JST04_1MM_RA]  169.67,119.13 180 top
J93  MICRO-SD-PUSH-PUSH-EXT-PIN  [MICROSD-EXTERNALPIN]  163.58,93.09 270 top
J94  5.5x2.1mm Barrel  [POWER_JACK_SMD]  161.54,76.96 0 top
J95  [1X02_NO_SILK]  179.2,106.43 90 top
J96  [1X02_NO_SILK]  179.83,78.49 0 top
J97  [1X10_SMD_COMBINED]  30.48,178.05 0 top
J98  [1X08_SMD_COMBINED]  39.62,129.79 0 top
J99  [1X08_SMD_COMBINED]  75.18,178.05 180 top
J100  [1X06_SMD_STRAIGHT_COMBO]  62.48,129.79 0 top
J101  USB C  [USB-C-16P-2LAYER-PADS]  18.03,166.62 270 top
J102  USB_SOLDER_PADS  [USB-SOLDER-PADS]  13.59,166.62 0 bottom
J103  M10NO_SILK  [1X10_NO_SILK]  30.48,181.86 0 top
J104  [1X08_NO_SILK]  39.62,125.98 0 top
J105  [1X06_NO_SILK]  62.48,125.98 0 top
J106  [1X08_NO_SILK]  75.18,181.86 180 top
J107  [2X5_PTH_SILK_.05]  59.94,161.54 0 top
J108  QWIIC_RIGHT_ANGLE  [JST04_1MM_RA]  21.84,178.05 180 top
J109  MICRO-SD-PUSH-PUSH-EXT-PIN  [MICROSD-EXTERNALPIN]  15.75,152.02 270 top
J110  5.5x2.1mm Barrel  [POWER_JACK_SMD]  13.72,135.89 0 top
J111  [1X02_NO_SILK]  31.37,165.35 90 top
J112  [1X02_NO_SILK]  32,137.41 0 top
J113  [1X10_SMD_COMBINED]  104.39,178.05 0 top
J114  [1X08_SMD_COMBINED]  113.54,129.79 0 top
J115  [1X08_SMD_COMBINED]  149.1,178.05 180 top
J116  [1X06_SMD_STRAIGHT_COMBO]  136.4,129.79 0 top
J117  USB C  [USB-C-16P-2LAYER-PADS]  91.95,166.62 270 top
J118  USB_SOLDER_PADS  [USB-SOLDER-PADS]  87.5,166.62 0 bottom
J119  M10NO_SILK  [1X10_NO_SILK]  104.39,181.86 0 top
J120  [1X08_NO_SILK]  113.54,125.98 0 top
J121  [1X06_NO_SILK]  136.4,125.98 0 top
J122  [1X08_NO_SILK]  149.1,181.86 180 top
J123  [2X5_PTH_SILK_.05]  133.86,161.54 0 top
J124  QWIIC_RIGHT_ANGLE  [JST04_1MM_RA]  95.76,178.05 180 top
J125  MICRO-SD-PUSH-PUSH-EXT-PIN  [MICROSD-EXTERNALPIN]  89.66,152.02 270 top
J126  5.5x2.1mm Barrel  [POWER_JACK_SMD]  87.63,135.89 0 top
J127  [1X02_NO_SILK]  105.28,165.35 90 top
J128  [1X02_NO_SILK]  105.92,137.41 0 top
J129  [1X10_SMD_COMBINED]  178.31,178.05 0 top
J130  [1X08_SMD_COMBINED]  187.45,129.79 0 top
J131  [1X08_SMD_COMBINED]  223.01,178.05 180 top
J132  [1X06_SMD_STRAIGHT_COMBO]  210.31,129.79 0 top
J133  USB C  [USB-C-16P-2LAYER-PADS]  165.86,166.62 270 top
J134  USB_SOLDER_PADS  [USB-SOLDER-PADS]  161.42,166.62 0 bottom
J135  M10NO_SILK  [1X10_NO_SILK]  178.31,181.86 0 top
J136  [1X08_NO_SILK]  187.45,125.98 0 top
J137  [1X06_NO_SILK]  210.31,125.98 0 top
J138  [1X08_NO_SILK]  223.01,181.86 180 top
J139  [2X5_PTH_SILK_.05]  207.77,161.54 0 top
J140  QWIIC_RIGHT_ANGLE  [JST04_1MM_RA]  169.67,178.05 180 top
J141  MICRO-SD-PUSH-PUSH-EXT-PIN  [MICROSD-EXTERNALPIN]  163.58,152.02 270 top
J142  5.5x2.1mm Barrel  [POWER_JACK_SMD]  161.54,135.89 0 top
J143  [1X02_NO_SILK]  179.2,165.35 90 top
J144  [1X02_NO_SILK]  179.83,137.41 0 top
J145  [1X10_SMD_COMBINED]  30.48,236.98 0 top
J146  [1X08_SMD_COMBINED]  39.62,188.72 0 top
J147  [1X08_SMD_COMBINED]  75.18,236.98 180 top
J148  [1X06_SMD_STRAIGHT_COMBO]  62.48,188.72 0 top
J149  USB C  [USB-C-16P-2LAYER-PADS]  18.03,225.55 270 top
J150  USB_SOLDER_PADS  [USB-SOLDER-PADS]  13.59,225.55 0 bottom
J151  M10NO_SILK  [1X10_NO_SILK]  30.48,240.79 0 top
J152  [1X08_NO_SILK]  39.62,184.91 0 top
J153  [1X06_NO_SILK]  62.48,184.91 0 top
J154  [1X08_NO_SILK]  75.18,240.79 180 top
J155  [2X5_PTH_SILK_.05]  59.94,220.47 0 top
J156  QWIIC_RIGHT_ANGLE  [JST04_1MM_RA]  21.84,236.98 180 top
J157  MICRO-SD-PUSH-PUSH-EXT-PIN  [MICROSD-EXTERNALPIN]  15.75,210.95 270 top
J158  5.5x2.1mm Barrel  [POWER_JACK_SMD]  13.72,194.82 0 top
J159  [1X02_NO_SILK]  31.37,224.28 90 top
J160  [1X02_NO_SILK]  32,196.34 0 top
J161  [1X10_SMD_COMBINED]  104.39,236.98 0 top
J162  [1X08_SMD_COMBINED]  113.54,188.72 0 top
J163  [1X08_SMD_COMBINED]  149.1,236.98 180 top
J164  [1X06_SMD_STRAIGHT_COMBO]  136.4,188.72 0 top
J165  USB C  [USB-C-16P-2LAYER-PADS]  91.95,225.55 270 top
J166  USB_SOLDER_PADS  [USB-SOLDER-PADS]  87.5,225.55 0 bottom
J167  M10NO_SILK  [1X10_NO_SILK]  104.39,240.79 0 top
J168  [1X08_NO_SILK]  113.54,184.91 0 top
J169  [1X06_NO_SILK]  136.4,184.91 0 top
J170  [1X08_NO_SILK]  149.1,240.79 180 top
J171  [2X5_PTH_SILK_.05]  133.86,220.47 0 top
J172  QWIIC_RIGHT_ANGLE  [JST04_1MM_RA]  95.76,236.98 180 top
J173  MICRO-SD-PUSH-PUSH-EXT-PIN  [MICROSD-EXTERNALPIN]  89.66,210.95 270 top
J174  5.5x2.1mm Barrel  [POWER_JACK_SMD]  87.63,194.82 0 top
J175  [1X02_NO_SILK]  105.28,224.28 90 top
J176  [1X02_NO_SILK]  105.92,196.34 0 top
J177  [1X10_SMD_COMBINED]  178.31,236.98 0 top
J178  [1X08_SMD_COMBINED]  187.45,188.72 0 top
J179  [1X08_SMD_COMBINED]  223.01,236.98 180 top
J180  [1X06_SMD_STRAIGHT_COMBO]  210.31,188.72 0 top
J181  USB C  [USB-C-16P-2LAYER-PADS]  165.86,225.55 270 top
J182  USB_SOLDER_PADS  [USB-SOLDER-PADS]  161.42,225.55 0 bottom
J183  M10NO_SILK  [1X10_NO_SILK]  178.31,240.79 0 top
J184  [1X08_NO_SILK]  187.45,184.91 0 top
J185  [1X06_NO_SILK]  210.31,184.91 0 top
J186  [1X08_NO_SILK]  223.01,240.79 180 top
J187  [2X5_PTH_SILK_.05]  207.77,220.47 0 top
J188  QWIIC_RIGHT_ANGLE  [JST04_1MM_RA]  169.67,236.98 180 top
J189  MICRO-SD-PUSH-PUSH-EXT-PIN  [MICROSD-EXTERNALPIN]  163.58,210.95 270 top
J190  5.5x2.1mm Barrel  [POWER_JACK_SMD]  161.54,194.82 0 top
J191  [1X02_NO_SILK]  179.2,224.28 90 top
J192  [1X02_NO_SILK]  179.83,196.34 0 top
JP1  FIDUCIAL1X2  [FIDUCIAL-1X2]  77.72,13.21 0 top
JP2  LiPo  [JST-2-SMD]  33.27,10.67 180 top
JP3  STAND-OFF  [STAND-OFF]  25.65,11.94 0 top
JP4  STAND-OFF  [STAND-OFF]  77.72,17.02 0 top
JP5  STAND-OFF  [STAND-OFF]  77.72,44.96 0 top
JP6  STAND-OFF  [STAND-OFF]  26.92,60.2 0 top
JP7  FIDUCIAL1X2  [FIDUCIAL-1X2]  26.92,64.01 0 bottom
JP8  FIDUCIAL1X2  [FIDUCIAL-1X2]  77.72,13.21 0 bottom
JP9  FIDUCIAL1X2  [FIDUCIAL-1X2]  26.92,64.01 0 top
JP10  JUMPER-SMT_2_NC_TRACE_SILK  [SMT-JUMPER_2_NC_TRACE_SILK]  33.91,48.77 90 bottom
JP11  JUMPER-SMT_3_2-NC_TRACE_SILK  [SMT-JUMPER_3_2-NC_TRACE_SILK]  72.64,51.69 270 bottom
JP12  JUMPER-SMT_2_NO_SILK  [SMT-JUMPER_2_NO_SILK]  70.1,52.32 90 bottom
JP13  JUMPER-SMT_2_NC_TRACE_SILK  [SMT-JUMPER_2_NC_TRACE_SILK]  67.56,52.32 90 bottom
JP14  JUMPER-SMT_2_NC_TRACE_SILK  [SMT-JUMPER_2_NC_TRACE_SILK]  65.02,52.32 90 bottom
JP15  STAND-OFF  [STAND-OFF]  99.57,11.94 0 top
JP16  STAND-OFF  [STAND-OFF]  151.64,17.02 0 top
JP17  STAND-OFF  [STAND-OFF]  151.64,44.96 0 top
JP18  STAND-OFF  [STAND-OFF]  100.84,60.2 0 top
JP19  FIDUCIAL1X2  [FIDUCIAL-1X2]  100.84,64.01 0 bottom
JP20  FIDUCIAL1X2  [FIDUCIAL-1X2]  151.64,13.21 0 top
JP21  FIDUCIAL1X2  [FIDUCIAL-1X2]  151.64,13.21 0 bottom
JP22  FIDUCIAL1X2  [FIDUCIAL-1X2]  100.84,64.01 0 top
JP23  JUMPER-SMT_3_2-NC_TRACE_SILK  [SMT-JUMPER_3_2-NC_TRACE_SILK]  146.56,51.69 270 bottom
JP24  JUMPER-SMT_2_NO_SILK  [SMT-JUMPER_2_NO_SILK]  144.02,52.32 90 bottom
JP25  JUMPER-SMT_2_NC_TRACE_SILK  [SMT-JUMPER_2_NC_TRACE_SILK]  141.48,52.32 90 bottom
JP26  JUMPER-SMT_2_NC_TRACE_SILK  [SMT-JUMPER_2_NC_TRACE_SILK]  138.94,52.32 90 bottom
JP27  LiPo  [JST-2-SMD]  107.19,10.67 180 top
JP28  JUMPER-SMT_2_NC_TRACE_SILK  [SMT-JUMPER_2_NC_TRACE_SILK]  107.82,48.77 90 bottom
JP29  STAND-OFF  [STAND-OFF]  173.48,11.94 0 top
JP30  STAND-OFF  [STAND-OFF]  225.55,17.02 0 top
JP31  STAND-OFF  [STAND-OFF]  225.55,44.96 0 top
JP32  STAND-OFF  [STAND-OFF]  174.75,60.2 0 top
JP33  FIDUCIAL1X2  [FIDUCIAL-1X2]  174.75,64.01 0 bottom
JP34  FIDUCIAL1X2  [FIDUCIAL-1X2]  225.55,13.21 0 top
JP35  FIDUCIAL1X2  [FIDUCIAL-1X2]  225.55,13.21 0 bottom
JP36  FIDUCIAL1X2  [FIDUCIAL-1X2]  174.75,64.01 0 top
JP37  JUMPER-SMT_3_2-NC_TRACE_SILK  [SMT-JUMPER_3_2-NC_TRACE_SILK]  220.47,51.69 270 bottom
JP38  JUMPER-SMT_2_NO_SILK  [SMT-JUMPER_2_NO_SILK]  217.93,52.32 90 bottom
JP39  JUMPER-SMT_2_NC_TRACE_SILK  [SMT-JUMPER_2_NC_TRACE_SILK]  215.39,52.32 90 bottom
JP40  JUMPER-SMT_2_NC_TRACE_SILK  [SMT-JUMPER_2_NC_TRACE_SILK]  212.85,52.32 90 bottom
JP41  LiPo  [JST-2-SMD]  181.1,10.67 180 top
JP42  JUMPER-SMT_2_NC_TRACE_SILK  [SMT-JUMPER_2_NC_TRACE_SILK]  181.74,48.77 90 bottom
JP43  STAND-OFF  [STAND-OFF]  25.65,70.87 0 top
JP44  STAND-OFF  [STAND-OFF]  77.72,75.95 0 top
JP45  STAND-OFF  [STAND-OFF]  77.72,103.89 0 top
JP46  STAND-OFF  [STAND-OFF]  26.92,119.13 0 top
JP47  FIDUCIAL1X2  [FIDUCIAL-1X2]  26.92,122.94 0 bottom
JP48  FIDUCIAL1X2  [FIDUCIAL-1X2]  77.72,72.14 0 top
JP49  FIDUCIAL1X2  [FIDUCIAL-1X2]  77.72,72.14 0 bottom
JP50  FIDUCIAL1X2  [FIDUCIAL-1X2]  26.92,122.94 0 top
JP51  JUMPER-SMT_3_2-NC_TRACE_SILK  [SMT-JUMPER_3_2-NC_TRACE_SILK]  72.64,110.62 270 bottom
JP52  JUMPER-SMT_2_NO_SILK  [SMT-JUMPER_2_NO_SILK]  70.1,111.25 90 bottom
JP53  JUMPER-SMT_2_NC_TRACE_SILK  [SMT-JUMPER_2_NC_TRACE_SILK]  67.56,111.25 90 bottom
JP54  JUMPER-SMT_2_NC_TRACE_SILK  [SMT-JUMPER_2_NC_TRACE_SILK]  65.02,111.25 90 bottom
JP55  LiPo  [JST-2-SMD]  33.27,69.6 180 top
JP56  JUMPER-SMT_2_NC_TRACE_SILK  [SMT-JUMPER_2_NC_TRACE_SILK]  33.91,107.7 90 bottom
JP57  STAND-OFF  [STAND-OFF]  99.57,70.87 0 top
JP58  STAND-OFF  [STAND-OFF]  151.64,75.95 0 top
JP59  STAND-OFF  [STAND-OFF]  151.64,103.89 0 top
JP60  STAND-OFF  [STAND-OFF]  100.84,119.13 0 top
JP61  FIDUCIAL1X2  [FIDUCIAL-1X2]  100.84,122.94 0 bottom
JP62  FIDUCIAL1X2  [FIDUCIAL-1X2]  151.64,72.14 0 top
JP63  FIDUCIAL1X2  [FIDUCIAL-1X2]  151.64,72.14 0 bottom
JP64  FIDUCIAL1X2  [FIDUCIAL-1X2]  100.84,122.94 0 top
JP65  JUMPER-SMT_3_2-NC_TRACE_SILK  [SMT-JUMPER_3_2-NC_TRACE_SILK]  146.56,110.62 270 bottom
JP66  JUMPER-SMT_2_NO_SILK  [SMT-JUMPER_2_NO_SILK]  144.02,111.25 90 bottom
JP67  JUMPER-SMT_2_NC_TRACE_SILK  [SMT-JUMPER_2_NC_TRACE_SILK]  141.48,111.25 90 bottom
JP68  JUMPER-SMT_2_NC_TRACE_SILK  [SMT-JUMPER_2_NC_TRACE_SILK]  138.94,111.25 90 bottom
JP69  LiPo  [JST-2-SMD]  107.19,69.6 180 top
JP70  JUMPER-SMT_2_NC_TRACE_SILK  [SMT-JUMPER_2_NC_TRACE_SILK]  107.82,107.7 90 bottom
JP71  STAND-OFF  [STAND-OFF]  173.48,70.87 0 top
JP72  STAND-OFF  [STAND-OFF]  225.55,75.95 0 top
JP73  STAND-OFF  [STAND-OFF]  225.55,103.89 0 top
JP74  STAND-OFF  [STAND-OFF]  174.75,119.13 0 top
JP75  FIDUCIAL1X2  [FIDUCIAL-1X2]  174.75,122.94 0 bottom
JP76  FIDUCIAL1X2  [FIDUCIAL-1X2]  225.55,72.14 0 top
JP77  FIDUCIAL1X2  [FIDUCIAL-1X2]  225.55,72.14 0 bottom
JP78  FIDUCIAL1X2  [FIDUCIAL-1X2]  174.75,122.94 0 top
JP79  JUMPER-SMT_3_2-NC_TRACE_SILK  [SMT-JUMPER_3_2-NC_TRACE_SILK]  220.47,110.62 270 bottom
JP80  JUMPER-SMT_2_NO_SILK  [SMT-JUMPER_2_NO_SILK]  217.93,111.25 90 bottom
JP81  JUMPER-SMT_2_NC_TRACE_SILK  [SMT-JUMPER_2_NC_TRACE_SILK]  215.39,111.25 90 bottom
JP82  JUMPER-SMT_2_NC_TRACE_SILK  [SMT-JUMPER_2_NC_TRACE_SILK]  212.85,111.25 90 bottom
JP83  LiPo  [JST-2-SMD]  181.1,69.6 180 top
JP84  JUMPER-SMT_2_NC_TRACE_SILK  [SMT-JUMPER_2_NC_TRACE_SILK]  181.74,107.7 90 bottom
JP85  STAND-OFF  [STAND-OFF]  25.65,129.79 0 top
JP86  STAND-OFF  [STAND-OFF]  77.72,134.87 0 top
JP87  STAND-OFF  [STAND-OFF]  77.72,162.81 0 top
JP88  STAND-OFF  [STAND-OFF]  26.92,178.05 0 top
JP89  FIDUCIAL1X2  [FIDUCIAL-1X2]  26.92,181.86 0 bottom
JP90  FIDUCIAL1X2  [FIDUCIAL-1X2]  77.72,131.06 0 top
JP91  FIDUCIAL1X2  [FIDUCIAL-1X2]  77.72,131.06 0 bottom
JP92  FIDUCIAL1X2  [FIDUCIAL-1X2]  26.92,181.86 0 top
JP93  JUMPER-SMT_3_2-NC_TRACE_SILK  [SMT-JUMPER_3_2-NC_TRACE_SILK]  72.64,169.55 270 bottom
JP94  JUMPER-SMT_2_NO_SILK  [SMT-JUMPER_2_NO_SILK]  70.1,170.18 90 bottom
JP95  JUMPER-SMT_2_NC_TRACE_SILK  [SMT-JUMPER_2_NC_TRACE_SILK]  67.56,170.18 90 bottom
JP96  JUMPER-SMT_2_NC_TRACE_SILK  [SMT-JUMPER_2_NC_TRACE_SILK]  65.02,170.18 90 bottom
JP97  LiPo  [JST-2-SMD]  33.27,128.52 180 top
JP98  JUMPER-SMT_2_NC_TRACE_SILK  [SMT-JUMPER_2_NC_TRACE_SILK]  33.91,166.62 90 bottom
JP99  STAND-OFF  [STAND-OFF]  99.57,129.79 0 top
JP100  STAND-OFF  [STAND-OFF]  151.64,134.87 0 top
JP101  STAND-OFF  [STAND-OFF]  151.64,162.81 0 top
JP102  STAND-OFF  [STAND-OFF]  100.84,178.05 0 top
JP103  FIDUCIAL1X2  [FIDUCIAL-1X2]  100.84,181.86 0 bottom
JP104  FIDUCIAL1X2  [FIDUCIAL-1X2]  151.64,131.06 0 top
JP105  FIDUCIAL1X2  [FIDUCIAL-1X2]  151.64,131.06 0 bottom
JP106  FIDUCIAL1X2  [FIDUCIAL-1X2]  100.84,181.86 0 top
JP107  JUMPER-SMT_3_2-NC_TRACE_SILK  [SMT-JUMPER_3_2-NC_TRACE_SILK]  146.56,169.55 270 bottom
JP108  JUMPER-SMT_2_NO_SILK  [SMT-JUMPER_2_NO_SILK]  144.02,170.18 90 bottom
JP109  JUMPER-SMT_2_NC_TRACE_SILK  [SMT-JUMPER_2_NC_TRACE_SILK]  141.48,170.18 90 bottom
JP110  JUMPER-SMT_2_NC_TRACE_SILK  [SMT-JUMPER_2_NC_TRACE_SILK]  138.94,170.18 90 bottom
JP111  LiPo  [JST-2-SMD]  107.19,128.52 180 top
JP112  JUMPER-SMT_2_NC_TRACE_SILK  [SMT-JUMPER_2_NC_TRACE_SILK]  107.82,166.62 90 bottom
JP113  STAND-OFF  [STAND-OFF]  173.48,129.79 0 top
JP114  STAND-OFF  [STAND-OFF]  225.55,134.87 0 top
JP115  STAND-OFF  [STAND-OFF]  225.55,162.81 0 top
JP116  STAND-OFF  [STAND-OFF]  174.75,178.05 0 top
JP117  FIDUCIAL1X2  [FIDUCIAL-1X2]  174.75,181.86 0 bottom
JP118  FIDUCIAL1X2  [FIDUCIAL-1X2]  225.55,131.06 0 top
JP119  FIDUCIAL1X2  [FIDUCIAL-1X2]  225.55,131.06 0 bottom
JP120  FIDUCIAL1X2  [FIDUCIAL-1X2]  174.75,181.86 0 top
JP121  JUMPER-SMT_3_2-NC_TRACE_SILK  [SMT-JUMPER_3_2-NC_TRACE_SILK]  220.47,169.55 270 bottom
JP122  JUMPER-SMT_2_NO_SILK  [SMT-JUMPER_2_NO_SILK]  217.93,170.18 90 bottom
JP123  JUMPER-SMT_2_NC_TRACE_SILK  [SMT-JUMPER_2_NC_TRACE_SILK]  215.39,170.18 90 bottom
JP124  JUMPER-SMT_2_NC_TRACE_SILK  [SMT-JUMPER_2_NC_TRACE_SILK]  212.85,170.18 90 bottom
JP125  LiPo  [JST-2-SMD]  181.1,128.52 180 top
JP126  JUMPER-SMT_2_NC_TRACE_SILK  [SMT-JUMPER_2_NC_TRACE_SILK]  181.74,166.62 90 bottom
JP127  STAND-OFF  [STAND-OFF]  25.65,188.72 0 top
JP128  STAND-OFF  [STAND-OFF]  77.72,193.8 0 top
JP129  STAND-OFF  [STAND-OFF]  77.72,221.74 0 top
JP130  STAND-OFF  [STAND-OFF]  26.92,236.98 0 top
JP131  FIDUCIAL1X2  [FIDUCIAL-1X2]  26.92,240.79 0 bottom
JP132  FIDUCIAL1X2  [FIDUCIAL-1X2]  77.72,189.99 0 top
JP133  FIDUCIAL1X2  [FIDUCIAL-1X2]  77.72,189.99 0 bottom
JP134  FIDUCIAL1X2  [FIDUCIAL-1X2]  26.92,240.79 0 top
JP135  JUMPER-SMT_3_2-NC_TRACE_SILK  [SMT-JUMPER_3_2-NC_TRACE_SILK]  72.64,228.47 270 bottom
JP136  JUMPER-SMT_2_NO_SILK  [SMT-JUMPER_2_NO_SILK]  70.1,229.11 90 bottom
JP137  JUMPER-SMT_2_NC_TRACE_SILK  [SMT-JUMPER_2_NC_TRACE_SILK]  67.56,229.11 90 bottom
JP138  JUMPER-SMT_2_NC_TRACE_SILK  [SMT-JUMPER_2_NC_TRACE_SILK]  65.02,229.11 90 bottom
JP139  LiPo  [JST-2-SMD]  33.27,187.45 180 top
JP140  JUMPER-SMT_2_NC_TRACE_SILK  [SMT-JUMPER_2_NC_TRACE_SILK]  33.91,225.55 90 bottom
JP141  STAND-OFF  [STAND-OFF]  99.57,188.72 0 top
JP142  STAND-OFF  [STAND-OFF]  151.64,193.8 0 top
JP143  STAND-OFF  [STAND-OFF]  151.64,221.74 0 top
JP144  STAND-OFF  [STAND-OFF]  100.84,236.98 0 top
JP145  FIDUCIAL1X2  [FIDUCIAL-1X2]  100.84,240.79 0 bottom
JP146  FIDUCIAL1X2  [FIDUCIAL-1X2]  151.64,189.99 0 top
JP147  FIDUCIAL1X2  [FIDUCIAL-1X2]  151.64,189.99 0 bottom
JP148  FIDUCIAL1X2  [FIDUCIAL-1X2]  100.84,240.79 0 top
JP149  JUMPER-SMT_3_2-NC_TRACE_SILK  [SMT-JUMPER_3_2-NC_TRACE_SILK]  146.56,228.47 270 bottom
JP150  JUMPER-SMT_2_NO_SILK  [SMT-JUMPER_2_NO_SILK]  144.02,229.11 90 bottom
JP151  JUMPER-SMT_2_NC_TRACE_SILK  [SMT-JUMPER_2_NC_TRACE_SILK]  141.48,229.11 90 bottom
JP152  JUMPER-SMT_2_NC_TRACE_SILK  [SMT-JUMPER_2_NC_TRACE_SILK]  138.94,229.11 90 bottom
JP153  LiPo  [JST-2-SMD]  107.19,187.45 180 top
JP154  JUMPER-SMT_2_NC_TRACE_SILK  [SMT-JUMPER_2_NC_TRACE_SILK]  107.82,225.55 90 bottom
JP155  STAND-OFF  [STAND-OFF]  173.48,188.72 0 top
JP156  STAND-OFF  [STAND-OFF]  225.55,193.8 0 top
JP157  STAND-OFF  [STAND-OFF]  225.55,221.74 0 top
JP158  STAND-OFF  [STAND-OFF]  174.75,236.98 0 top
JP159  FIDUCIAL1X2  [FIDUCIAL-1X2]  174.75,240.79 0 bottom
JP160  FIDUCIAL1X2  [FIDUCIAL-1X2]  225.55,189.99 0 top
JP161  FIDUCIAL1X2  [FIDUCIAL-1X2]  225.55,189.99 0 bottom
JP162  FIDUCIAL1X2  [FIDUCIAL-1X2]  174.75,240.79 0 top
JP163  JUMPER-SMT_3_2-NC_TRACE_SILK  [SMT-JUMPER_3_2-NC_TRACE_SILK]  220.47,228.47 270 bottom
JP164  JUMPER-SMT_2_NO_SILK  [SMT-JUMPER_2_NO_SILK]  217.93,229.11 90 bottom
JP165  JUMPER-SMT_2_NC_TRACE_SILK  [SMT-JUMPER_2_NC_TRACE_SILK]  215.39,229.11 90 bottom
JP166  JUMPER-SMT_2_NC_TRACE_SILK  [SMT-JUMPER_2_NC_TRACE_SILK]  212.85,229.11 90 bottom
JP167  LiPo  [JST-2-SMD]  181.1,187.45 180 top
JP168  JUMPER-SMT_2_NC_TRACE_SILK  [SMT-JUMPER_2_NC_TRACE_SILK]  181.74,225.55 90 bottom
LOGO1  SFE_LOGO_NAME.1_INCH  [SFE_LOGO_NAME_.1]  60.58,20.19 0 top
LOGO2  QWIIC_LOGO_5MM  [QWIIC_5MM]  21.84,58.42 0 top
LOGO3  OSHW-LOGOMINI  [OSHW-LOGO-MINI]  13.97,8.89 0 bottom
LOGO4  QWIIC_LOGO_5MM  [QWIIC_5MM]  21.84,63.75 0 bottom
LOGO5  SFE_LOGO_NAME.1_INCH  [SFE_LOGO_NAME_.1]  134.49,20.19 0 top
LOGO6  SFE_LOGO_NAME_FLAME.2_INCH  [SFE_LOGO_NAME_FLAME_.2]  45.97,44.96 0 bottom
LOGO7  QWIIC_LOGO_5MM  [QWIIC_5MM]  95.76,58.42 0 top
LOGO8  OSHW-LOGOMINI  [OSHW-LOGO-MINI]  87.88,8.89 0 bottom
LOGO9  QWIIC_LOGO_5MM  [QWIIC_5MM]  95.76,63.75 0 bottom
LOGO10  SFE_LOGO_NAME_FLAME.2_INCH  [SFE_LOGO_NAME_FLAME_.2]  119.89,44.96 0 bottom
LOGO11  SFE_LOGO_NAME.1_INCH  [SFE_LOGO_NAME_.1]  208.41,20.19 0 top
LOGO12  QWIIC_LOGO_5MM  [QWIIC_5MM]  169.67,58.42 0 top
LOGO13  OSHW-LOGOMINI  [OSHW-LOGO-MINI]  161.8,8.89 0 bottom
LOGO14  QWIIC_LOGO_5MM  [QWIIC_5MM]  169.67,63.75 0 bottom
LOGO15  SFE_LOGO_NAME_FLAME.2_INCH  [SFE_LOGO_NAME_FLAME_.2]  193.8,44.96 0 bottom
LOGO16  SFE_LOGO_NAME.1_INCH  [SFE_LOGO_NAME_.1]  60.58,79.12 0 top
LOGO17  QWIIC_LOGO_5MM  [QWIIC_5MM]  21.84,117.35 0 top
LOGO18  OSHW-LOGOMINI  [OSHW-LOGO-MINI]  13.97,67.82 0 bottom
LOGO19  QWIIC_LOGO_5MM  [QWIIC_5MM]  21.84,122.68 0 bottom
LOGO20  SFE_LOGO_NAME_FLAME.2_INCH  [SFE_LOGO_NAME_FLAME_.2]  45.97,103.89 0 bottom
LOGO21  SFE_LOGO_NAME.1_INCH  [SFE_LOGO_NAME_.1]  134.49,79.12 0 top
LOGO22  QWIIC_LOGO_5MM  [QWIIC_5MM]  95.76,117.35 0 top
LOGO23  OSHW-LOGOMINI  [OSHW-LOGO-MINI]  87.88,67.82 0 bottom
LOGO24  QWIIC_LOGO_5MM  [QWIIC_5MM]  95.76,122.68 0 bottom
LOGO25  SFE_LOGO_NAME_FLAME.2_INCH  [SFE_LOGO_NAME_FLAME_.2]  119.89,103.89 0 bottom
LOGO26  SFE_LOGO_NAME.1_INCH  [SFE_LOGO_NAME_.1]  208.41,79.12 0 top
LOGO27  QWIIC_LOGO_5MM  [QWIIC_5MM]  169.67,117.35 0 top
LOGO28  OSHW-LOGOMINI  [OSHW-LOGO-MINI]  161.8,67.82 0 bottom
LOGO29  QWIIC_LOGO_5MM  [QWIIC_5MM]  169.67,122.68 0 bottom
LOGO30  SFE_LOGO_NAME_FLAME.2_INCH  [SFE_LOGO_NAME_FLAME_.2]  193.8,103.89 0 bottom
LOGO31  SFE_LOGO_NAME.1_INCH  [SFE_LOGO_NAME_.1]  60.58,138.05 0 top
LOGO32  QWIIC_LOGO_5MM  [QWIIC_5MM]  21.84,176.28 0 top
LOGO33  OSHW-LOGOMINI  [OSHW-LOGO-MINI]  13.97,126.75 0 bottom
LOGO34  QWIIC_LOGO_5MM  [QWIIC_5MM]  21.84,181.61 0 bottom
LOGO35  SFE_LOGO_NAME_FLAME.2_INCH  [SFE_LOGO_NAME_FLAME_.2]  45.97,162.81 0 bottom
LOGO36  SFE_LOGO_NAME.1_INCH  [SFE_LOGO_NAME_.1]  134.49,138.05 0 top
LOGO37  QWIIC_LOGO_5MM  [QWIIC_5MM]  95.76,176.28 0 top
LOGO38  OSHW-LOGOMINI  [OSHW-LOGO-MINI]  87.88,126.75 0 bottom
LOGO39  QWIIC_LOGO_5MM  [QWIIC_5MM]  95.76,181.61 0 bottom
LOGO40  SFE_LOGO_NAME_FLAME.2_INCH  [SFE_LOGO_NAME_FLAME_.2]  119.89,162.81 0 bottom
LOGO41  SFE_LOGO_NAME.1_INCH  [SFE_LOGO_NAME_.1]  208.41,138.05 0 top
LOGO42  QWIIC_LOGO_5MM  [QWIIC_5MM]  169.67,176.28 0 top
LOGO43  OSHW-LOGOMINI  [OSHW-LOGO-MINI]  161.8,126.75 0 bottom
LOGO44  QWIIC_LOGO_5MM  [QWIIC_5MM]  169.67,181.61 0 bottom
LOGO45  SFE_LOGO_NAME_FLAME.2_INCH  [SFE_LOGO_NAME_FLAME_.2]  193.8,162.81 0 bottom
LOGO46  SFE_LOGO_NAME.1_INCH  [SFE_LOGO_NAME_.1]  60.58,196.98 0 top
LOGO47  QWIIC_LOGO_5MM  [QWIIC_5MM]  21.84,235.2 0 top
LOGO48  OSHW-LOGOMINI  [OSHW-LOGO-MINI]  13.97,185.67 0 bottom
LOGO49  QWIIC_LOGO_5MM  [QWIIC_5MM]  21.84,240.54 0 bottom
LOGO50  SFE_LOGO_NAME_FLAME.2_INCH  [SFE_LOGO_NAME_FLAME_.2]  45.97,221.74 0 bottom
LOGO51  SFE_LOGO_NAME.1_INCH  [SFE_LOGO_NAME_.1]  134.49,196.98 0 top
LOGO52  QWIIC_LOGO_5MM  [QWIIC_5MM]  95.76,235.2 0 top
LOGO53  OSHW-LOGOMINI  [OSHW-LOGO-MINI]  87.88,185.67 0 bottom
LOGO54  QWIIC_LOGO_5MM  [QWIIC_5MM]  95.76,240.54 0 bottom
LOGO55  SFE_LOGO_NAME_FLAME.2_INCH  [SFE_LOGO_NAME_FLAME_.2]  119.89,221.74 0 bottom
LOGO56  SFE_LOGO_NAME.1_INCH  [SFE_LOGO_NAME_.1]  208.41,196.98 0 top
LOGO57  QWIIC_LOGO_5MM  [QWIIC_5MM]  169.67,235.2 0 top
LOGO58  OSHW-LOGOMINI  [OSHW-LOGO-MINI]  161.8,185.67 0 bottom
LOGO59  QWIIC_LOGO_5MM  [QWIIC_5MM]  169.67,240.54 0 bottom
LOGO60  SFE_LOGO_NAME_FLAME.2_INCH  [SFE_LOGO_NAME_FLAME_.2]  193.8,221.74 0 bottom
Q1  MBT3904DW1T1  [SC70-6]  53.59,44.96 180 top
Q2  [SC70-6]  44.7,34.8 270 top
Q3  20V/4.2A/52mΩ/1.4W  [SOT23-3]  40.89,34.8 90 top
Q4  [SOT363_PHILIPS]  44.7,38.61 270 top
Q5  20V/4.2A/52mΩ/1.4W  [SOT23-3]  40.89,38.61 90 top
Q6  [SOT363_PHILIPS]  44.7,19.56 270 top
Q7  20V/4.2A/52mΩ/1.4W  [SOT23-3]  40.89,27.18 90 top
Q8  [SOT363_PHILIPS]  44.7,30.99 270 top
Q9  20V/4.2A/52mΩ/1.4W  [SOT23-3]  40.89,30.99 90 top
Q10  [SOT363_PHILIPS]  44.7,27.18 270 top
Q11  20V/4.2A/52mΩ/1.4W  [SOT23-3]  40.89,23.37 270 top
Q12  [SOT363_PHILIPS]  44.7,23.37 270 top
Q13  20V/4.2A/52mΩ/1.4W  [SOT23-3]  40.89,19.56 270 top
Q14  MBT3904DW1T1  [SC70-6]  127.51,44.96 180 top
Q15  [SOT363_PHILIPS]  118.62,38.61 270 top
Q16  20V/4.2A/52mΩ/1.4W  [SOT23-3]  114.81,38.61 90 top
Q17  [SC70-6]  118.62,34.8 270 top
Q18  20V/4.2A/52mΩ/1.4W  [SOT23-3]  114.81,34.8 90 top
Q19  [SOT363_PHILIPS]  118.62,19.56 270 top
Q20  20V/4.2A/52mΩ/1.4W  [SOT23-3]  114.81,27.18 90 top
Q21  [SOT363_PHILIPS]  118.62,30.99 270 top
Q22  20V/4.2A/52mΩ/1.4W  [SOT23-3]  114.81,30.99 90 top
Q23  [SOT363_PHILIPS]  118.62,27.18 270 top
Q24  20V/4.2A/52mΩ/1.4W  [SOT23-3]  114.81,23.37 270 top
Q25  [SOT363_PHILIPS]  118.62,23.37 270 top
Q26  20V/4.2A/52mΩ/1.4W  [SOT23-3]  114.81,19.56 270 top
Q27  MBT3904DW1T1  [SC70-6]  201.42,44.96 180 top
Q28  [SOT363_PHILIPS]  192.53,38.61 270 top
Q29  20V/4.2A/52mΩ/1.4W  [SOT23-3]  188.72,38.61 90 top
Q30  [SC70-6]  192.53,34.8 270 top
Q31  20V/4.2A/52mΩ/1.4W  [SOT23-3]  188.72,34.8 90 top
Q32  [SOT363_PHILIPS]  192.53,19.56 270 top
Q33  20V/4.2A/52mΩ/1.4W  [SOT23-3]  188.72,27.18 90 top
Q34  [SOT363_PHILIPS]  192.53,30.99 270 top
Q35  20V/4.2A/52mΩ/1.4W  [SOT23-3]  188.72,30.99 90 top
Q36  [SOT363_PHILIPS]  192.53,27.18 270 top
Q37  20V/4.2A/52mΩ/1.4W  [SOT23-3]  188.72,23.37 270 top
Q38  [SOT363_PHILIPS]  192.53,23.37 270 top
Q39  20V/4.2A/52mΩ/1.4W  [SOT23-3]  188.72,19.56 270 top
Q40  MBT3904DW1T1  [SC70-6]  53.59,103.89 180 top
Q41  [SOT363_PHILIPS]  44.7,97.54 270 top
Q42  20V/4.2A/52mΩ/1.4W  [SOT23-3]  40.89,97.54 90 top
Q43  [SC70-6]  44.7,93.73 270 top
Q44  20V/4.2A/52mΩ/1.4W  [SOT23-3]  40.89,93.73 90 top
Q45  [SOT363_PHILIPS]  44.7,78.49 270 top
Q46  20V/4.2A/52mΩ/1.4W  [SOT23-3]  40.89,86.11 90 top
Q47  [SOT363_PHILIPS]  44.7,89.92 270 top
Q48  20V/4.2A/52mΩ/1.4W  [SOT23-3]  40.89,89.92 90 top
Q49  [SOT363_PHILIPS]  44.7,86.11 270 top
Q50  20V/4.2A/52mΩ/1.4W  [SOT23-3]  40.89,82.3 270 top
Q51  [SOT363_PHILIPS]  44.7,82.3 270 top
Q52  20V/4.2A/52mΩ/1.4W  [SOT23-3]  40.89,78.49 270 top
Q53  MBT3904DW1T1  [SC70-6]  127.51,103.89 180 top
Q54  [SOT363_PHILIPS]  118.62,97.54 270 top
Q55  20V/4.2A/52mΩ/1.4W  [SOT23-3]  114.81,97.54 90 top
Q56  [SC70-6]  118.62,93.73 270 top
Q57  20V/4.2A/52mΩ/1.4W  [SOT23-3]  114.81,93.73 90 top
Q58  [SOT363_PHILIPS]  118.62,78.49 270 top
Q59  20V/4.2A/52mΩ/1.4W  [SOT23-3]  114.81,86.11 90 top
Q60  [SOT363_PHILIPS]  118.62,89.92 270 top
Q61  20V/4.2A/52mΩ/1.4W  [SOT23-3]  114.81,89.92 90 top
Q62  [SOT363_PHILIPS]  118.62,86.11 270 top
Q63  20V/4.2A/52mΩ/1.4W  [SOT23-3]  114.81,82.3 270 top
Q64  [SOT363_PHILIPS]  118.62,82.3 270 top
Q65  20V/4.2A/52mΩ/1.4W  [SOT23-3]  114.81,78.49 270 top
Q66  MBT3904DW1T1  [SC70-6]  201.42,103.89 180 top
Q67  [SOT363_PHILIPS]  192.53,97.54 270 top
Q68  20V/4.2A/52mΩ/1.4W  [SOT23-3]  188.72,97.54 90 top
Q69  [SC70-6]  192.53,93.73 270 top
Q70  20V/4.2A/52mΩ/1.4W  [SOT23-3]  188.72,93.73 90 top
Q71  [SOT363_PHILIPS]  192.53,78.49 270 top
Q72  20V/4.2A/52mΩ/1.4W  [SOT23-3]  188.72,86.11 90 top
Q73  [SOT363_PHILIPS]  192.53,89.92 270 top
Q74  20V/4.2A/52mΩ/1.4W  [SOT23-3]  188.72,89.92 90 top
Q75  [SOT363_PHILIPS]  192.53,86.11 270 top
Q76  20V/4.2A/52mΩ/1.4W  [SOT23-3]  188.72,82.3 270 top
Q77  [SOT363_PHILIPS]  192.53,82.3 270 top
Q78  20V/4.2A/52mΩ/1.4W  [SOT23-3]  188.72,78.49 270 top
Q79  MBT3904DW1T1  [SC70-6]  53.59,162.81 180 top
Q80  [SOT363_PHILIPS]  44.7,156.46 270 top
Q81  20V/4.2A/52mΩ/1.4W  [SOT23-3]  40.89,156.46 90 top
Q82  [SC70-6]  44.7,152.65 270 top
Q83  20V/4.2A/52mΩ/1.4W  [SOT23-3]  40.89,152.65 90 top
Q84  [SOT363_PHILIPS]  44.7,137.41 270 top
Q85  20V/4.2A/52mΩ/1.4W  [SOT23-3]  40.89,145.03 90 top
Q86  [SOT363_PHILIPS]  44.7,148.84 270 top
Q87  20V/4.2A/52mΩ/1.4W  [SOT23-3]  40.89,148.84 90 top
Q88  [SOT363_PHILIPS]  44.7,145.03 270 top
Q89  20V/4.2A/52mΩ/1.4W  [SOT23-3]  40.89,141.22 270 top
Q90  [SOT363_PHILIPS]  44.7,141.22 270 top
Q91  20V/4.2A/52mΩ/1.4W  [SOT23-3]  40.89,137.41 270 top
Q92  MBT3904DW1T1  [SC70-6]  127.51,162.81 180 top
Q93  [SOT363_PHILIPS]  118.62,156.46 270 top